# Altium PCB RbMotor_ECAT_RevB+.PcbDoc (part 1 of 4)
Units mm, origin at the board's own origin, x right, y up, seen from the top; angles counter-clockwise.
Board outline 58 x 58 mm, 4 copper layers (F.Cu, In1.Cu, In2.Cu, B.Cu); 285 components, 277 nets, 865 pads, 722 vias.
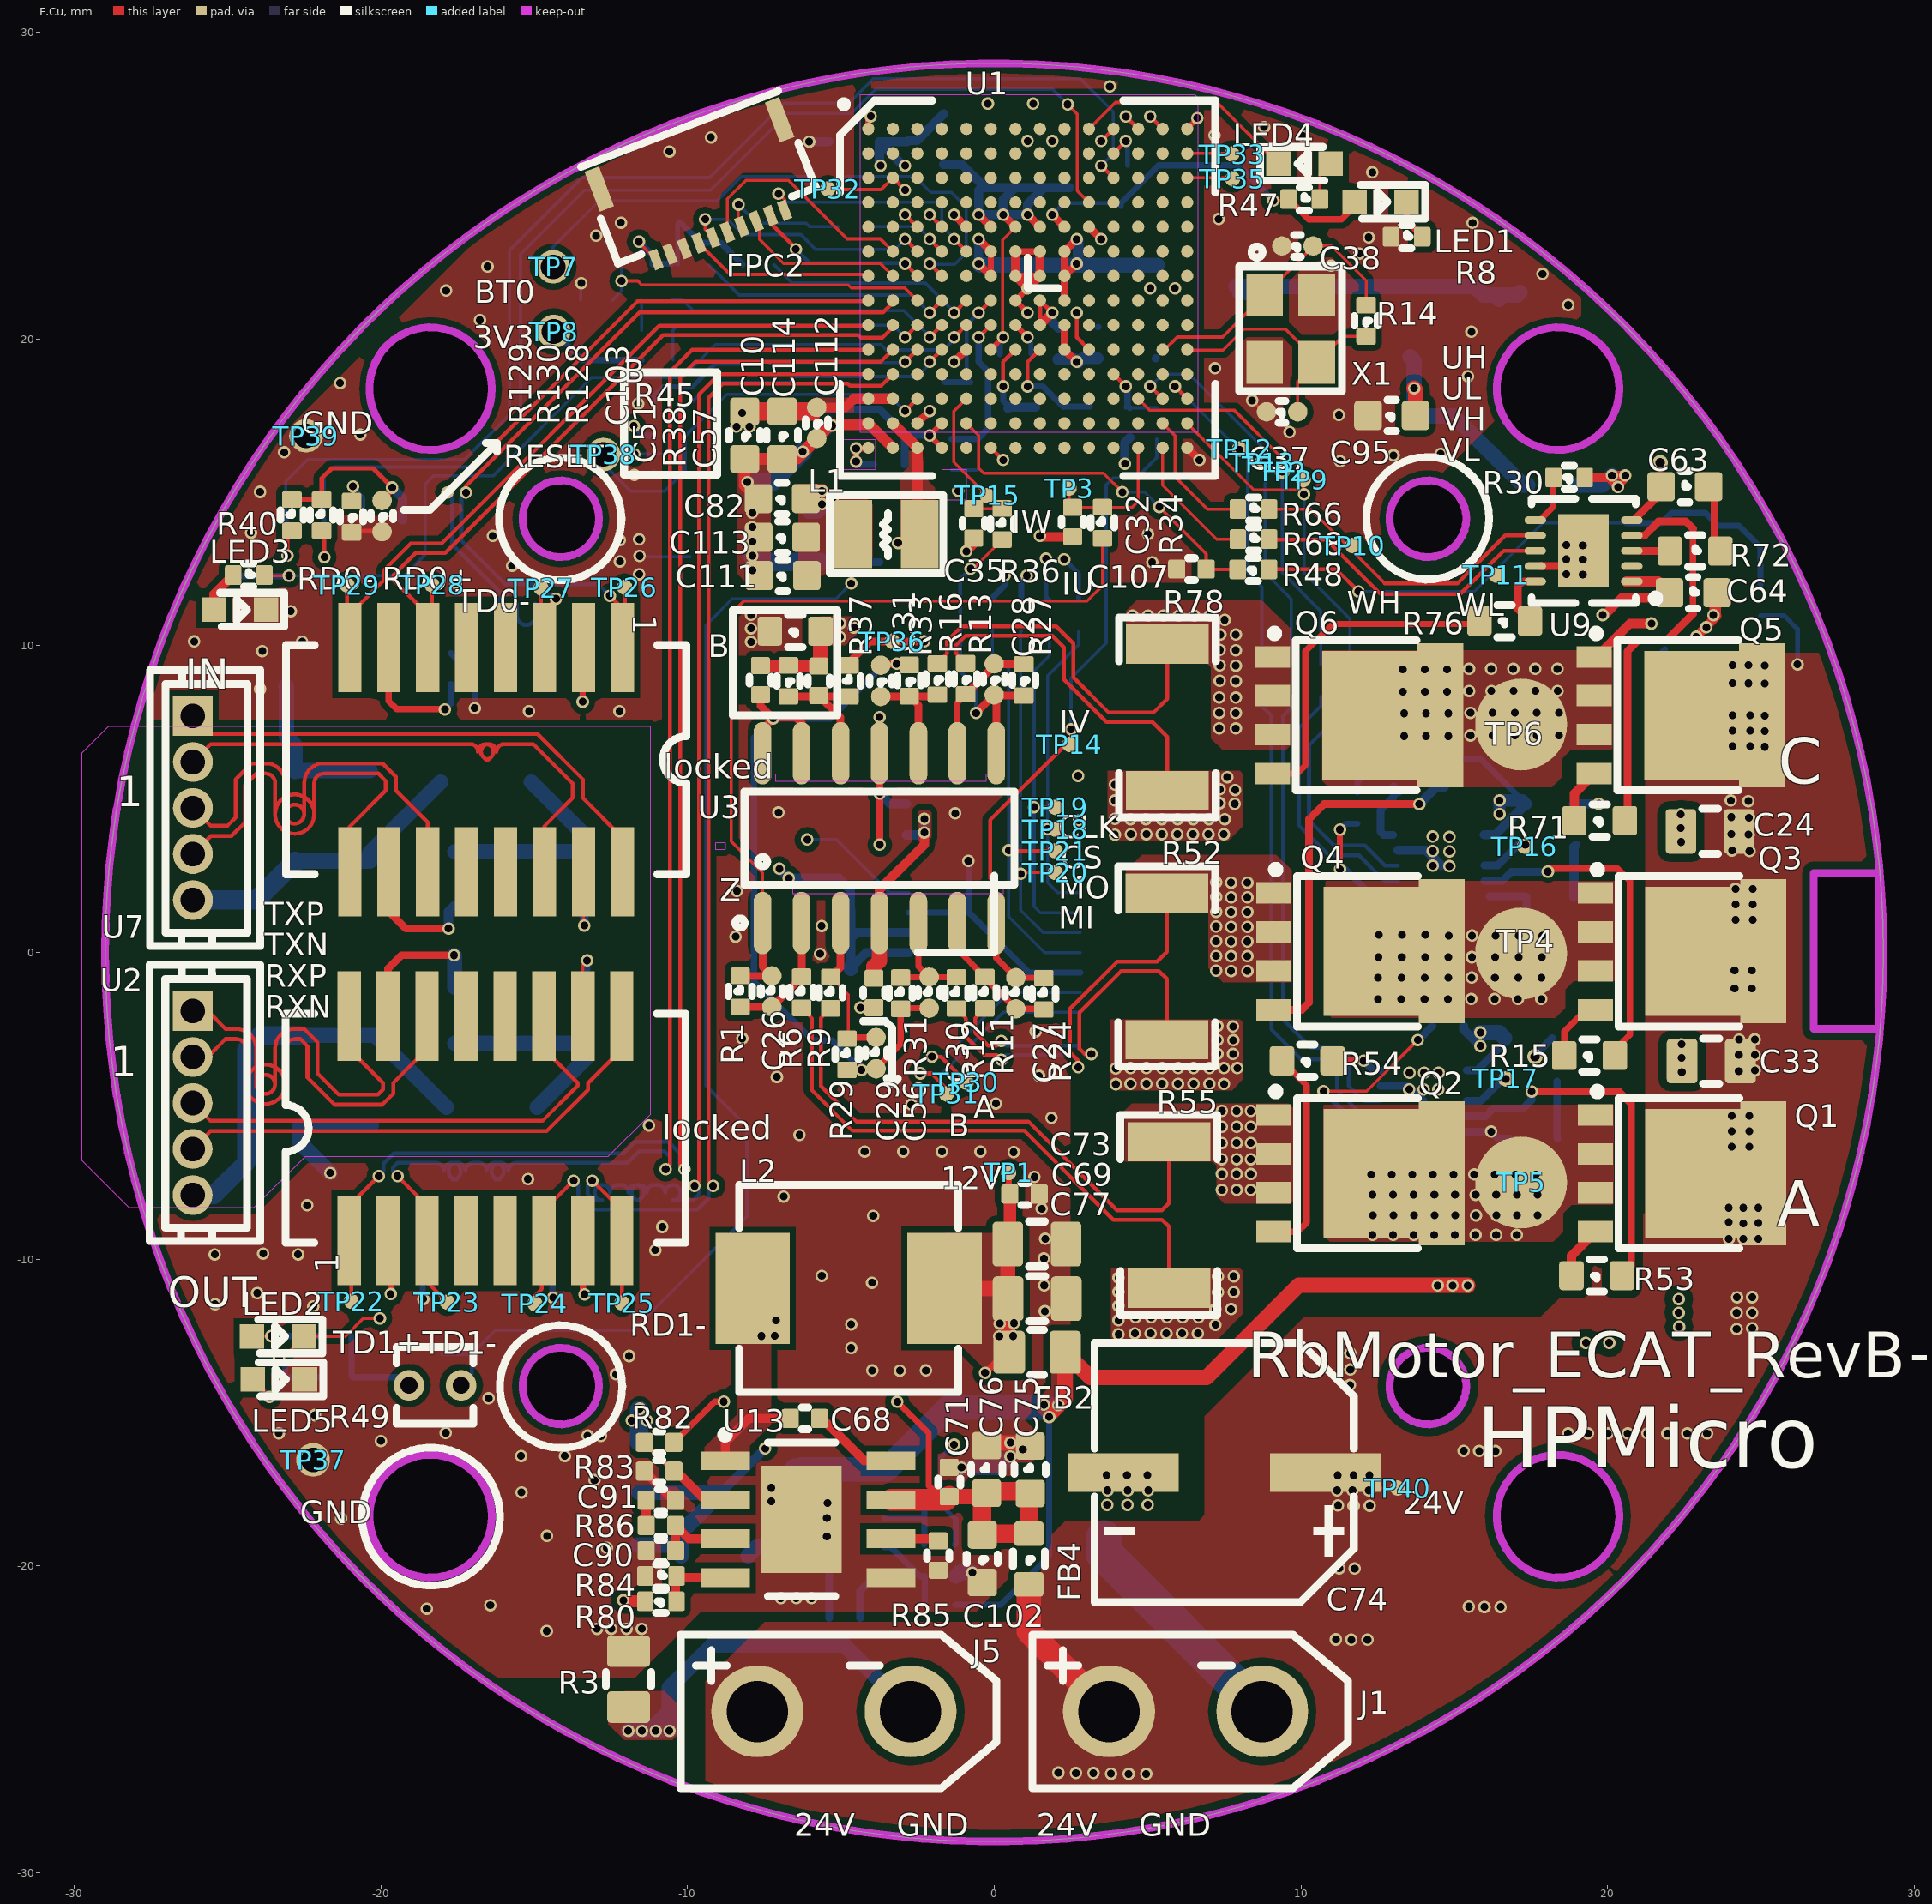
[diagram p0: F.Cu view]
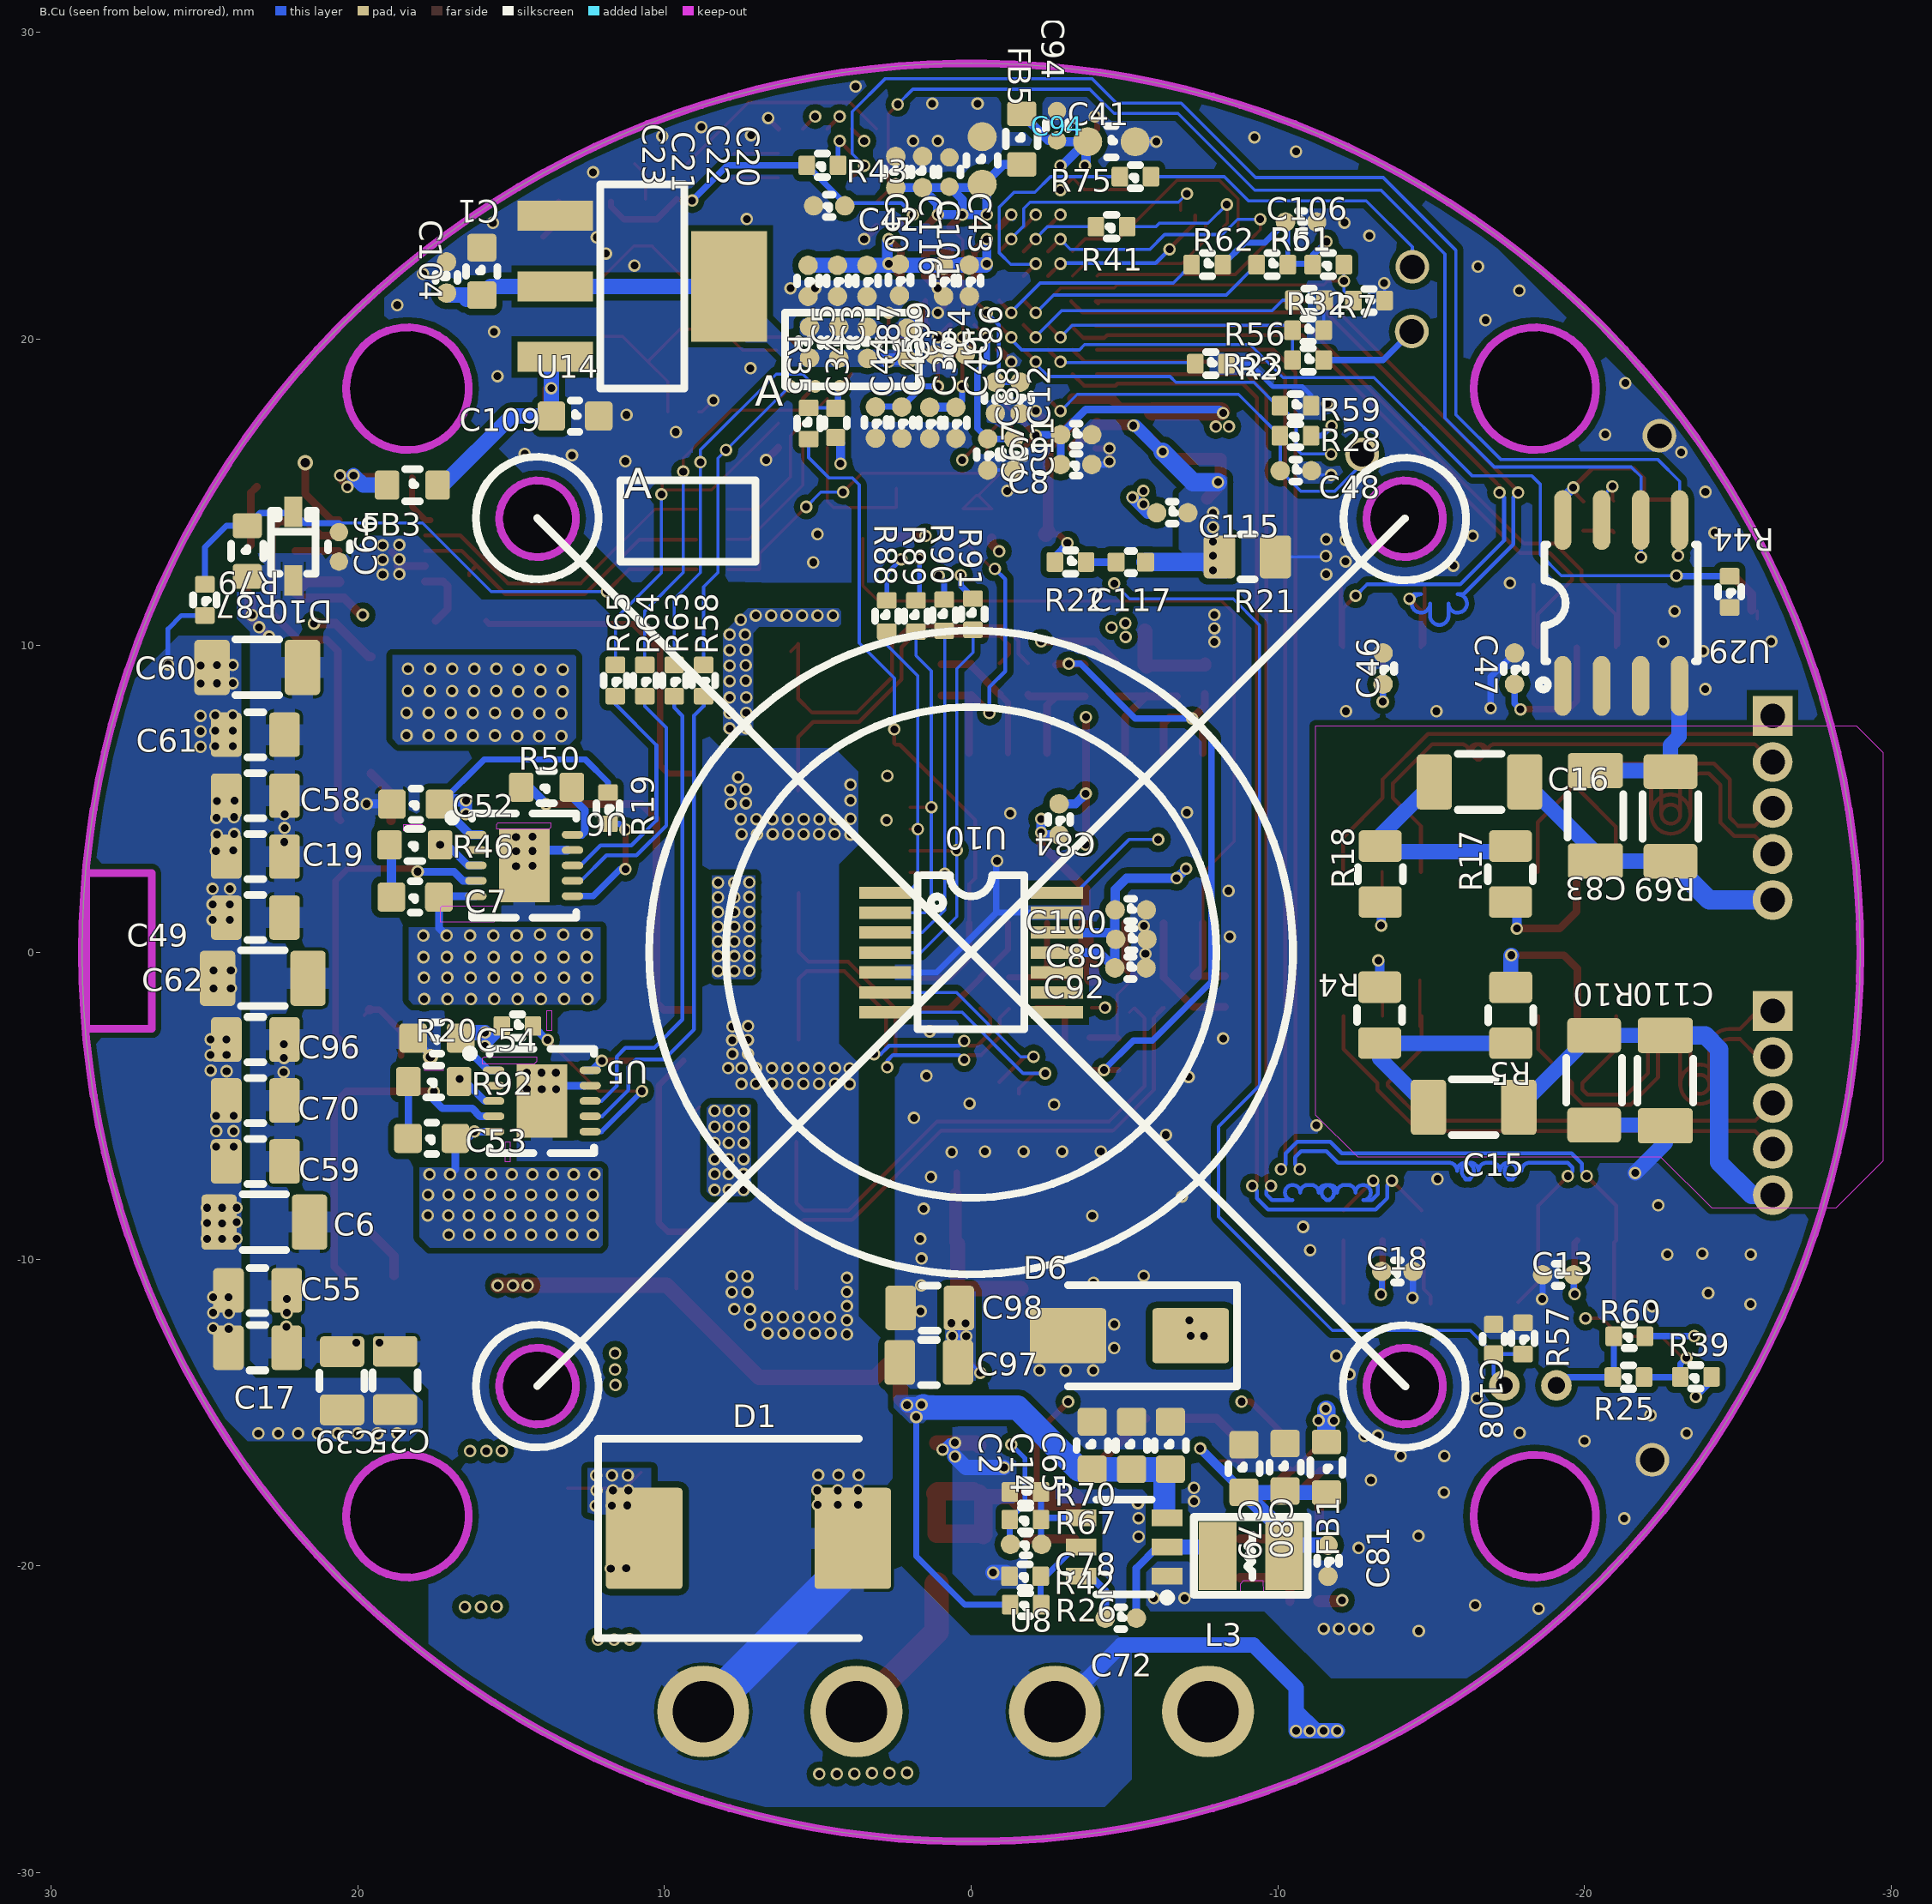
[diagram p1: B.Cu view, seen from below]
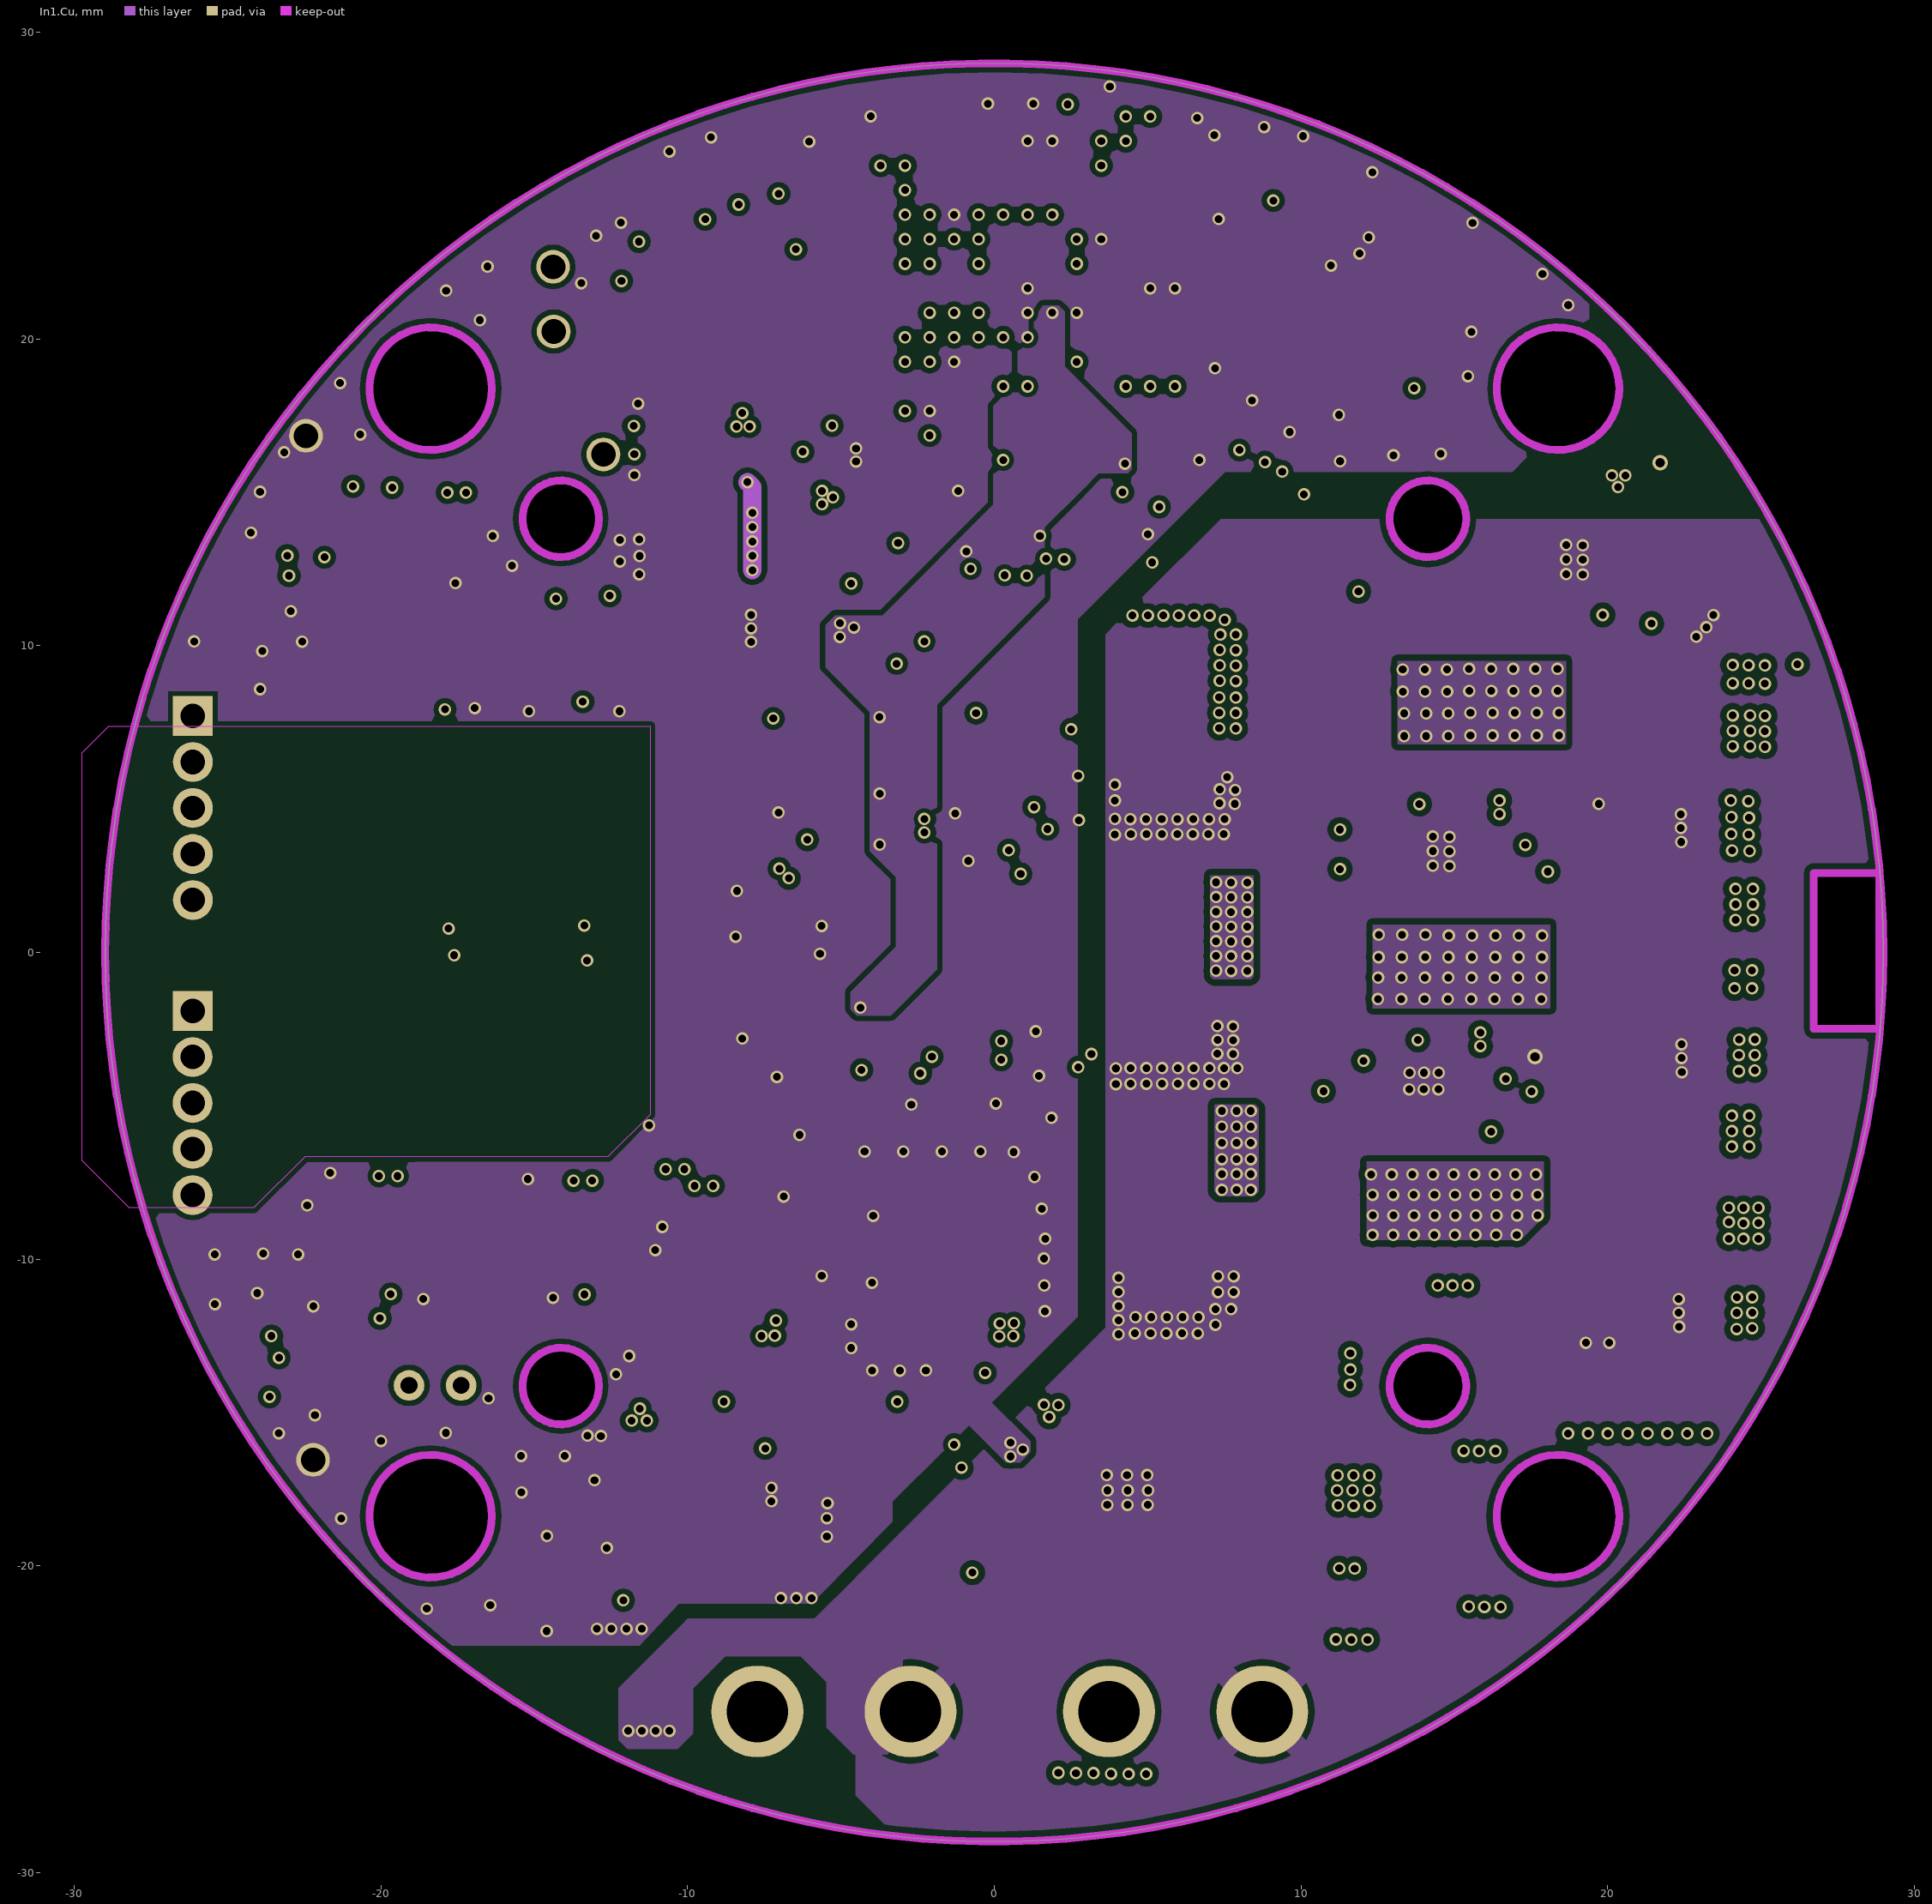
[diagram p2: In1.Cu]
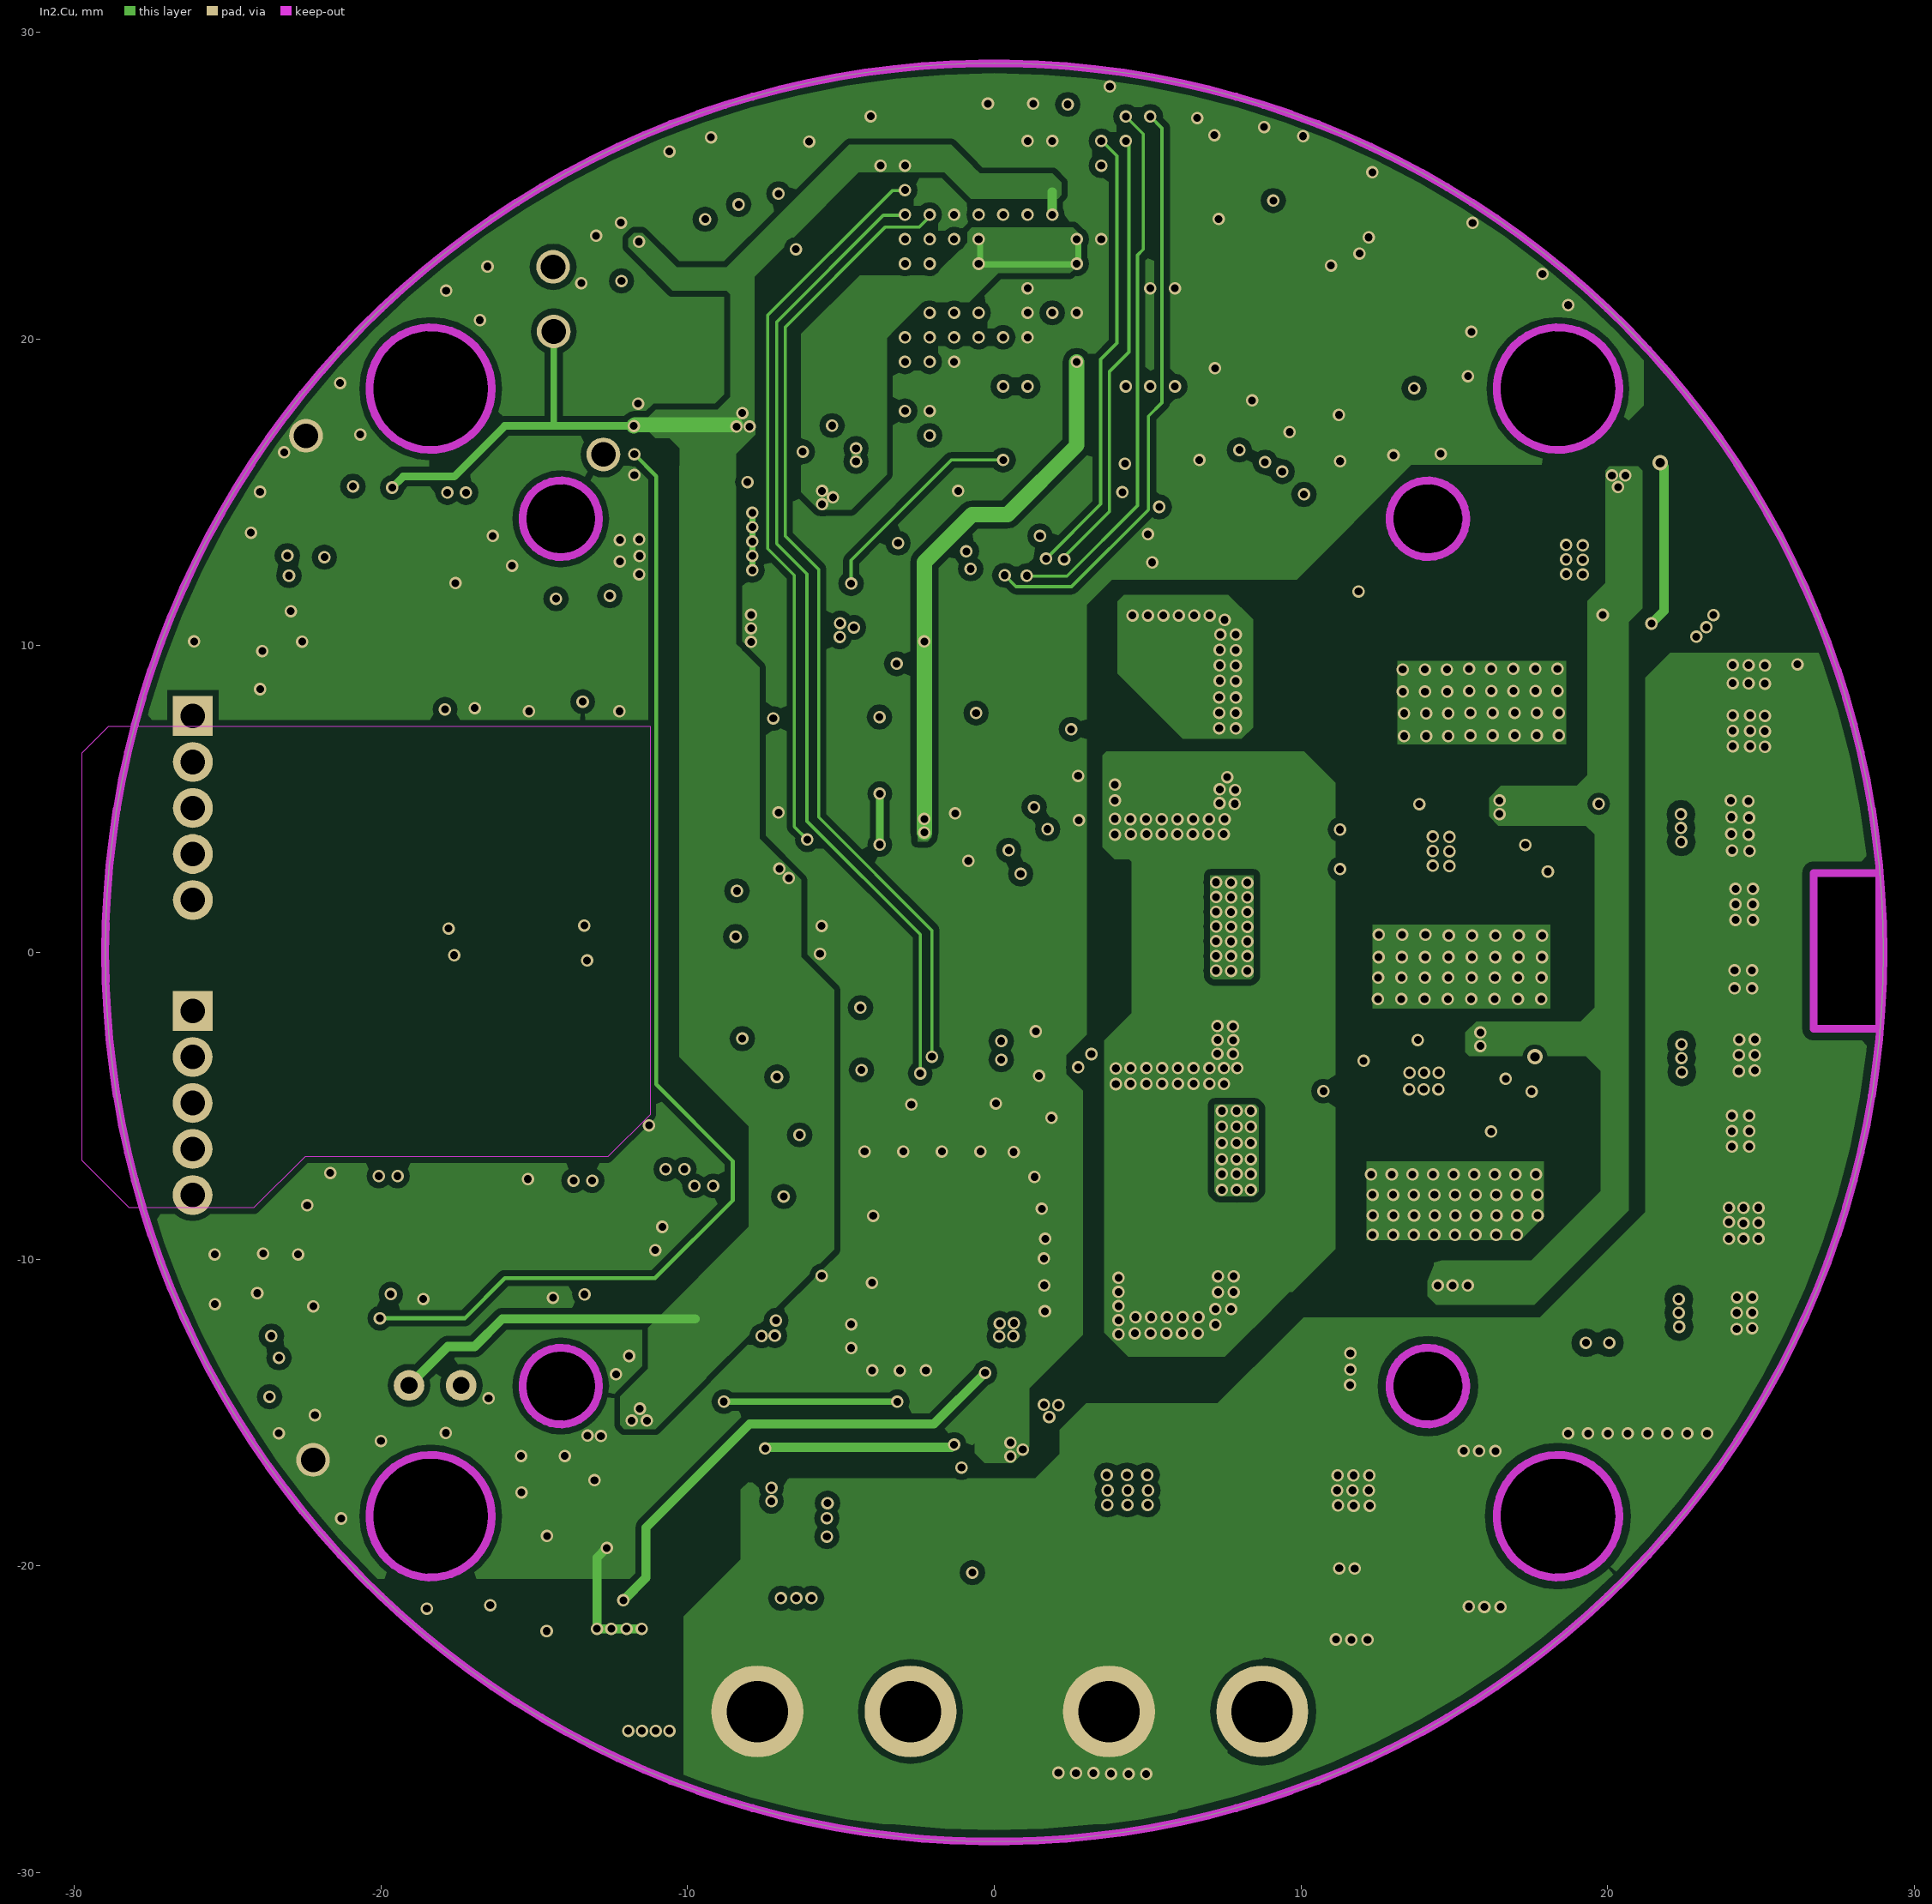
[diagram p3: In2.Cu]

## Layer stack, top to bottom
F.Mask: solder mask 0.0102, Solder Resist, Dk 3.5
F.Cu: signal copper 0.0356
Dielectric 1: dielectric 0.32, FR-4, Dk 4.8
In1.Cu: signal copper 0.0356
Dielectric2: dielectric 0.32, FR-4, Dk 4.8
In2.Cu: signal copper 0.0356
Dielectric3: dielectric 0.32, FR-4, Dk 4.8
B.Cu: signal copper 0.0356
B.Mask: solder mask 0.0102, Solder Resist, Dk 3.5

## Board outline
29,0 ccw(c0,0) 0,29 ccw(c0,0) -29,0 ccw(c0,0) 0,-29 ccw(c0,0)
cut-out: 20.394,-18.385 20.356,-17.993 20.241,-17.616 20.056,-17.268 19.806,-16.964 19.501,-16.714 19.154,-16.528 18.777,-16.414 18.385,-16.375 17.993,-16.414 17.616,-16.528 17.268,-16.714 16.964,-16.964 16.714,-17.268 16.528,-17.616 16.414,-17.993 16.375,-18.385 16.414,-18.777 16.528,-19.154 16.714,-19.501 16.964,-19.806 17.268,-20.056 17.616,-20.242 17.993,-20.356 18.385,-20.394 18.777,-20.356 19.154,-20.242 19.501,-20.056 19.806,-19.806 20.056,-19.501 20.241,-19.154 20.356,-18.777 20.394,-18.385
cut-out: 26.73,2.586 26.73,-2.484 28.86,-2.484 28.86,2.586 26.73,2.586
cut-out: 20.394,18.385 20.356,18.777 20.241,19.154 20.056,19.501 19.806,19.806 19.501,20.056 19.154,20.241 18.777,20.356 18.385,20.394 17.993,20.356 17.616,20.241 17.268,20.056 16.964,19.806 16.714,19.501 16.528,19.154 16.414,18.777 16.375,18.385 16.414,17.993 16.528,17.616 16.714,17.268 16.964,16.964 17.268,16.714 17.616,16.528 17.993,16.414 18.385,16.375 18.777,16.414 19.154,16.528 19.501,16.714 19.806,16.964 20.056,17.268 20.241,17.616 20.356,17.993 20.394,18.385
cut-out: -16.375,-18.385 -16.414,-17.993 -16.528,-17.616 -16.714,-17.268 -16.964,-16.964 -17.268,-16.714 -17.616,-16.528 -17.993,-16.414 -18.385,-16.375 -18.777,-16.414 -19.154,-16.528 -19.501,-16.714 -19.806,-16.964 -20.056,-17.268 -20.242,-17.616 -20.356,-17.993 -20.394,-18.385 -20.356,-18.777 -20.242,-19.154 -20.056,-19.501 -19.806,-19.806 -19.501,-20.056 -19.154,-20.241 -18.777,-20.356 -18.385,-20.394 -17.993,-20.356 -17.616,-20.241 -17.268,-20.056 -16.964,-19.806 -16.714,-19.501 -16.528,-19.154 -16.414,-18.777 -16.375,-18.385
cut-out: 15.403,-14.142 15.36,-13.816 15.234,-13.512 15.034,-13.251 14.773,-13.05 14.468,-12.924 14.142,-12.881 13.816,-12.924 13.512,-13.05 13.251,-13.251 13.05,-13.512 12.924,-13.816 12.881,-14.142 12.924,-14.468 13.05,-14.773 13.251,-15.034 13.512,-15.234 13.816,-15.36 14.142,-15.403 14.468,-15.36 14.773,-15.234 15.034,-15.034 15.234,-14.773 15.36,-14.468 15.403,-14.142
cut-out: -12.881,14.142 -12.924,14.468 -13.05,14.773 -13.251,15.034 -13.512,15.234 -13.816,15.36 -14.142,15.403 -14.468,15.36 -14.773,15.234 -15.034,15.034 -15.234,14.773 -15.36,14.468 -15.403,14.142 -15.36,13.816 -15.234,13.512 -15.034,13.251 -14.773,13.05 -14.468,12.924 -14.142,12.881 -13.816,12.924 -13.512,13.05 -13.251,13.251 -13.05,13.512 -12.924,13.816 -12.881,14.142
cut-out: -16.375,18.385 -16.414,18.777 -16.528,19.154 -16.714,19.501 -16.964,19.806 -17.268,20.056 -17.616,20.241 -17.993,20.356 -18.385,20.394 -18.777,20.356 -19.154,20.241 -19.501,20.056 -19.806,19.806 -20.056,19.501 -20.241,19.154 -20.356,18.777 -20.394,18.385 -20.356,17.993 -20.241,17.616 -20.056,17.268 -19.806,16.964 -19.501,16.714 -19.154,16.528 -18.777,16.414 -18.385,16.375 -17.993,16.414 -17.616,16.528 -17.268,16.714 -16.964,16.964 -16.714,17.268 -16.528,17.616 -16.414,17.993 -16.375,18.385
cut-out: 15.403,14.142 15.36,14.468 15.234,14.772 15.034,15.034 14.773,15.234 14.468,15.36 14.142,15.403 13.816,15.36 13.512,15.234 13.251,15.034 13.05,14.772 12.924,14.468 12.881,14.142 12.924,13.816 13.05,13.512 13.251,13.251 13.512,13.05 13.816,12.924 14.142,12.881 14.468,12.924 14.773,13.05 15.034,13.251 15.234,13.512 15.36,13.816 15.403,14.142
cut-out: -12.881,-14.142 -12.924,-13.816 -13.05,-13.512 -13.251,-13.251 -13.512,-13.05 -13.816,-12.924 -14.142,-12.881 -14.468,-12.924 -14.773,-13.05 -15.034,-13.251 -15.234,-13.512 -15.36,-13.816 -15.403,-14.142 -15.36,-14.468 -15.234,-14.773 -15.034,-15.034 -14.773,-15.234 -14.468,-15.36 -14.142,-15.403 -13.816,-15.36 -13.512,-15.234 -13.251,-15.034 -13.05,-14.773 -12.924,-14.468 -12.881,-14.142

## Design rules (kind name [scope] priority, off if disabled: settings)
Clearance "Clearence 0.254_Polygon" [InNamedPolygon('F.Cu-+24V') OR InNamedPolygon('In2.Cu-+24V')] p1: gap=0.254 ignorepadtopadclearanceinfootprint=FALSE
Clearance "Clearence 0.2_Polygon" [InNamedPolygon('F.Cu-+1V2') OR InNamedPolygon('F.Cu-+12VA') OR InNamedPolygon('F.Cu-BGND-1') OR InNamedPolygon('F.Cu-GND') OR InNamedPolygon('F.Cu-+12V') OR InNamedPolygon('F.Cu-Net-(D6-K)') OR InNamedPolygon('F.Cu-+3.3V') OR InNamedPolygon('F.Cu-DCDC_GND') OR InNamedPolygon('F.Cu-DCDC_LP') OR InNamedPolygon('F.Cu-+3.3VA') OR InNamedPolygon('In2.Cu-+3.3VA') OR InNamedPolygon('F.Cu-GND-1') OR InNamedPolygon('B.Cu-GND') OR InNamedPolygon('In1.Cu-GND-1') OR InNamedPolygon('In1.Cu-BGND') OR InNamedPolygon('In1.Cu-BGND-1') OR InNamedPolygon('In1.Cu-/ MAIN/13.Motor DriverB/MOTOR-V') OR InNamedPolygon('In2.Cu-/ MAIN/13.Motor DriverB/MOTOR-V') OR InNamedPolygon('In1.Cu-/ MAIN/12.Motor DriverA/MOTOR-U') OR InNamedPolygon('In2.Cu-/ MAIN/12.Motor DriverA/MOTOR-U') OR InNamedPolygon('In1.Cu-/ MAIN/14.Motor DriverC/MOTOR-W') OR InNamedPolygon('In2.Cu-/ MAIN/14.Motor DriverC/MOTOR-W') OR InNamedPolygon('In1.Cu-MT_IV') OR InNamedPolygon('In2.Cu-MT_IV') OR InNamedPolygon('B.Cu-MT_IV') OR InNamedPolygon('In1.Cu-MT_IU') OR InNamedPolygon('In2.Cu-MT_IU') OR InNamedPolygon('B.Cu-MT_IU') OR InNamedPolygon('In2.Cu-GND') OR InNamedPolygon('In2.Cu-+3.3V') OR InNamedPolygon('In2.Cu-BGND') OR InNamedPolygon('In2.Cu-+24V-1') OR InNamedPolygon('In2.Cu-+3.3V-1') OR InNamedPolygon('In2.Cu-GND-1') OR InNamedPolygon('In2.Cu-MT_IW') OR InNamedPolygon('In2.Cu-+1V2') OR InNamedPolygon('B.Cu-AGND') OR InNamedPolygon('B.Cu-+12VA') OR InNamedPolygon('B.Cu-+12V') OR InNamedPolygon('B.Cu-DCDC_GND') OR InNamedPolygon('B.Cu-+3.3VA') OR InNamedPolygon('B.Cu-BGND')] p2: gap=0.2 ignorepadtopadclearanceinfootprint=FALSE
Clearance "Clearence 0.18_Polygon" [InNamedPolygon('B.Cu-+24V')] p3: gap=0.18 ignorepadtopadclearanceinfootprint=FALSE
Clearance "Clearence 0.17_Polygon" [InNamedPolygon('In1.Cu-GND')] p4: gap=0.17 ignorepadtopadclearanceinfootprint=FALSE
Clearance "Clearence 0.1524_Polygon" [InNamedPolygon('F.Cu-BGND') OR InNamedPolygon('F.Cu-MT_IU') OR InNamedPolygon('F.Cu-BGND-2') OR InNamedPolygon('F.Cu-MT_IW') OR InNamedPolygon('F.Cu-/ MAIN/12.Motor DriverA/MOTOR-U') OR InNamedPolygon('F.Cu-MT_IV') OR InNamedPolygon('F.Cu-/ MAIN/14.Motor DriverC/MOTOR-W') OR InNamedPolygon('F.Cu-BGND-3') OR InNamedPolygon('F.Cu-/ MAIN/13.Motor DriverB/MOTOR-V') OR InNamedPolygon('In1.Cu-AGND') OR InNamedPolygon('In2.Cu-+12V') OR InNamedPolygon('B.Cu-/ MAIN/12.Motor DriverA/MOTOR-U') OR InNamedPolygon('B.Cu-/ MAIN/14.Motor DriverC/MOTOR-W') OR InNamedPolygon('B.Cu-/ MAIN/13.Motor DriverB/MOTOR-V')] p5: gap=0.152 ignorepadtopadclearanceinfootprint=FALSE
Clearance "Clearence 0.15_Polygon" [InNamedPolygon('F.Cu-AGND')] p6: gap=0.15 ignorepadtopadclearanceinfootprint=FALSE
MinimumSolderMaskSliver [All] p1: minsoldermaskwidth=0
PolygonConnect Polygon_B.Cu-+24V-1_ConnectDirect [IsNamedPolygon('B.Cu-+24V-1')] p1: connectstyle=Direct reliefconductorwidth=0.254 reliefentries=4 polygonreliefangle="90 Angle" airgapwidth=0.254
PolygonConnect Polygon_B.Cu-BGND_ConnectDirect [IsNamedPolygon('B.Cu-BGND') vs IsVia] p2: connectstyle=Direct reliefconductorwidth=0.254 reliefentries=4 polygonreliefangle="90 Angle" airgapwidth=0.254
PolygonConnect Polygon_B.Cu-BGND_ConnectRelief45 [IsNamedPolygon('B.Cu-BGND') vs (IsThruPin or IsSMTPin) and (PadShape_AllLayers = 'Round')] p3: connectstyle=Relief reliefconductorwidth=0.7 reliefentries=4 polygonreliefangle="45 Angle" airgapwidth=0.1
PolygonConnect Polygon_B.Cu-BGND_ConnectRelief90 [IsNamedPolygon('B.Cu-BGND') vs (IsThruPin or IsSMTPin) and (PadShape_AllLayers <> 'Round')] p4: connectstyle=Relief reliefconductorwidth=0.7 reliefentries=4 polygonreliefangle="90 Angle" airgapwidth=0.1
PolygonConnect "Polygon_B.Cu-/ MAIN/13.Motor DriverB/MOTOR-V_ConnectDirect" [IsNamedPolygon('B.Cu-/ MAIN/13.Motor DriverB/MOTOR-V')] p5: connectstyle=Direct reliefconductorwidth=0.254 reliefentries=4 polygonreliefangle="90 Angle" airgapwidth=0.254
PolygonConnect Polygon_B.Cu-+3.3VA_ConnectDirect [IsNamedPolygon('B.Cu-+3.3VA')] p6: connectstyle=Direct reliefconductorwidth=0.254 reliefentries=4 polygonreliefangle="90 Angle" airgapwidth=0.254
PolygonConnect "Polygon_B.Cu-/ MAIN/14.Motor DriverC/MOTOR-W_ConnectDirect" [IsNamedPolygon('B.Cu-/ MAIN/14.Motor DriverC/MOTOR-W')] p7: connectstyle=Direct reliefconductorwidth=0.254 reliefentries=4 polygonreliefangle="90 Angle" airgapwidth=0.254
PolygonConnect Polygon_B.Cu-DCDC_GND_ConnectDirect [IsNamedPolygon('B.Cu-DCDC_GND')] p8: connectstyle=Direct reliefconductorwidth=0.254 reliefentries=4 polygonreliefangle="90 Angle" airgapwidth=0.254
PolygonConnect Polygon_B.Cu-+12V_ConnectDirect [IsNamedPolygon('B.Cu-+12V')] p9: connectstyle=Direct reliefconductorwidth=0.254 reliefentries=4 polygonreliefangle="90 Angle" airgapwidth=0.254
PolygonConnect Polygon_B.Cu-+12VA_ConnectDirect [IsNamedPolygon('B.Cu-+12VA')] p10: connectstyle=Direct reliefconductorwidth=0.254 reliefentries=4 polygonreliefangle="90 Angle" airgapwidth=0.254
PolygonConnect Polygon_B.Cu-+24V_ConnectDirect [IsNamedPolygon('B.Cu-+24V')] p11: connectstyle=Direct reliefconductorwidth=0.254 reliefentries=4 polygonreliefangle="90 Angle" airgapwidth=0.254
PolygonConnect Polygon_B.Cu-AGND_ConnectDirect [IsNamedPolygon('B.Cu-AGND')] p12: connectstyle=Direct reliefconductorwidth=0.254 reliefentries=4 polygonreliefangle="90 Angle" airgapwidth=0.254
PolygonConnect "Polygon_B.Cu-/ MAIN/12.Motor DriverA/MOTOR-U_ConnectDirect" [IsNamedPolygon('B.Cu-/ MAIN/12.Motor DriverA/MOTOR-U')] p13: connectstyle=Direct reliefconductorwidth=0.254 reliefentries=4 polygonreliefangle="90 Angle" airgapwidth=0.254
PolygonConnect Polygon_B.Cu-MT_IW_ConnectDirect [IsNamedPolygon('B.Cu-MT_IW')] p14: connectstyle=Direct reliefconductorwidth=0.254 reliefentries=4 polygonreliefangle="90 Angle" airgapwidth=0.254
PolygonConnect Polygon_In2.Cu-+1V2_ConnectDirect [IsNamedPolygon('In2.Cu-+1V2')] p15: connectstyle=Direct reliefconductorwidth=0.254 reliefentries=4 polygonreliefangle="90 Angle" airgapwidth=0.254
PolygonConnect Polygon_In2.Cu-MT_IW_ConnectDirect [IsNamedPolygon('In2.Cu-MT_IW')] p16: connectstyle=Direct reliefconductorwidth=0.254 reliefentries=4 polygonreliefangle="90 Angle" airgapwidth=0.254
PolygonConnect Polygon_In2.Cu-+12V-1_ConnectDirect [IsNamedPolygon('In2.Cu-+12V-1')] p17: connectstyle=Direct reliefconductorwidth=0.254 reliefentries=4 polygonreliefangle="90 Angle" airgapwidth=0.254
PolygonConnect Polygon_In2.Cu-GND-1_ConnectDirect [IsNamedPolygon('In2.Cu-GND-1')] p18: connectstyle=Direct reliefconductorwidth=0.254 reliefentries=4 polygonreliefangle="90 Angle" airgapwidth=0.254
PolygonConnect Polygon_In2.Cu-+3.3V-1_ConnectDirect [IsNamedPolygon('In2.Cu-+3.3V-1')] p19: connectstyle=Direct reliefconductorwidth=0.254 reliefentries=4 polygonreliefangle="90 Angle" airgapwidth=0.254
PolygonConnect Polygon_In2.Cu-+24V-1_ConnectDirect [IsNamedPolygon('In2.Cu-+24V-1')] p20: connectstyle=Direct reliefconductorwidth=0.254 reliefentries=4 polygonreliefangle="90 Angle" airgapwidth=0.254
PolygonConnect Polygon_In2.Cu-BGND_ConnectDirect [IsNamedPolygon('In2.Cu-BGND')] p21: connectstyle=Direct reliefconductorwidth=0.254 reliefentries=4 polygonreliefangle="90 Angle" airgapwidth=0.254
PolygonConnect Polygon_In2.Cu-+3.3V_ConnectDirect [IsNamedPolygon('In2.Cu-+3.3V') vs IsVia] p22: connectstyle=Direct reliefconductorwidth=0.254 reliefentries=4 polygonreliefangle="90 Angle" airgapwidth=0.254
PolygonConnect Polygon_In2.Cu-+3.3V_ConnectRelief45 [IsNamedPolygon('In2.Cu-+3.3V') vs (IsThruPin or IsSMTPin) and (PadShape_AllLayers = 'Round')] p23: connectstyle=Relief reliefconductorwidth=0.5 reliefentries=4 polygonreliefangle="45 Angle" airgapwidth=0.5
PolygonConnect Polygon_In2.Cu-+3.3V_ConnectRelief90 [IsNamedPolygon('In2.Cu-+3.3V') vs (IsThruPin or IsSMTPin) and (PadShape_AllLayers <> 'Round')] p24: connectstyle=Relief reliefconductorwidth=0.5 reliefentries=4 polygonreliefangle="90 Angle" airgapwidth=0.5
PolygonConnect Polygon_In2.Cu-GND_ConnectDirect [IsNamedPolygon('In2.Cu-GND')] p25: connectstyle=Direct reliefconductorwidth=0.254 reliefentries=4 polygonreliefangle="90 Angle" airgapwidth=0.254
PolygonConnect Polygon_In2.Cu-+12V_ConnectDirect [IsNamedPolygon('In2.Cu-+12V')] p26: connectstyle=Direct reliefconductorwidth=0.254 reliefentries=4 polygonreliefangle="90 Angle" airgapwidth=0.254
PolygonConnect Polygon_B.Cu-MT_IU_ConnectDirect [IsNamedPolygon('B.Cu-MT_IU')] p27: connectstyle=Direct reliefconductorwidth=0.254 reliefentries=4 polygonreliefangle="90 Angle" airgapwidth=0.254
PolygonConnect Polygon_In2.Cu-MT_IU_ConnectDirect [IsNamedPolygon('In2.Cu-MT_IU')] p28: connectstyle=Direct reliefconductorwidth=0.254 reliefentries=4 polygonreliefangle="90 Angle" airgapwidth=0.254
PolygonConnect Polygon_In1.Cu-MT_IU_ConnectDirect [IsNamedPolygon('In1.Cu-MT_IU')] p29: connectstyle=Direct reliefconductorwidth=0.254 reliefentries=4 polygonreliefangle="90 Angle" airgapwidth=0.254
PolygonConnect Polygon_B.Cu-MT_IV_ConnectDirect [IsNamedPolygon('B.Cu-MT_IV')] p30: connectstyle=Direct reliefconductorwidth=0.254 reliefentries=4 polygonreliefangle="90 Angle" airgapwidth=0.254
PolygonConnect Polygon_In2.Cu-MT_IV_ConnectDirect [IsNamedPolygon('In2.Cu-MT_IV')] p31: connectstyle=Direct reliefconductorwidth=0.254 reliefentries=4 polygonreliefangle="90 Angle" airgapwidth=0.254
PolygonConnect Polygon_In1.Cu-MT_IV_ConnectDirect [IsNamedPolygon('In1.Cu-MT_IV')] p32: connectstyle=Direct reliefconductorwidth=0.254 reliefentries=4 polygonreliefangle="90 Angle" airgapwidth=0.254
PolygonConnect "Polygon_In2.Cu-/ MAIN/14.Motor DriverC/MOTOR-W_ConnectDirect" [IsNamedPolygon('In2.Cu-/ MAIN/14.Motor DriverC/MOTOR-W')] p33: connectstyle=Direct reliefconductorwidth=0.254 reliefentries=4 polygonreliefangle="90 Angle" airgapwidth=0.254
PolygonConnect "Polygon_In1.Cu-/ MAIN/14.Motor DriverC/MOTOR-W_ConnectDirect" [IsNamedPolygon('In1.Cu-/ MAIN/14.Motor DriverC/MOTOR-W')] p34: connectstyle=Direct reliefconductorwidth=0.254 reliefentries=4 polygonreliefangle="90 Angle" airgapwidth=0.254
PolygonConnect "Polygon_In2.Cu-/ MAIN/12.Motor DriverA/MOTOR-U_ConnectDirect" [IsNamedPolygon('In2.Cu-/ MAIN/12.Motor DriverA/MOTOR-U')] p35: connectstyle=Direct reliefconductorwidth=0.254 reliefentries=4 polygonreliefangle="90 Angle" airgapwidth=0.254
PolygonConnect "Polygon_In1.Cu-/ MAIN/12.Motor DriverA/MOTOR-U_ConnectDirect" [IsNamedPolygon('In1.Cu-/ MAIN/12.Motor DriverA/MOTOR-U')] p36: connectstyle=Direct reliefconductorwidth=0.254 reliefentries=4 polygonreliefangle="90 Angle" airgapwidth=0.254
PolygonConnect "Polygon_In2.Cu-/ MAIN/13.Motor DriverB/MOTOR-V_ConnectDirect" [IsNamedPolygon('In2.Cu-/ MAIN/13.Motor DriverB/MOTOR-V')] p37: connectstyle=Direct reliefconductorwidth=0.254 reliefentries=4 polygonreliefangle="90 Angle" airgapwidth=0.254
PolygonConnect "Polygon_In1.Cu-/ MAIN/13.Motor DriverB/MOTOR-V_ConnectDirect" [IsNamedPolygon('In1.Cu-/ MAIN/13.Motor DriverB/MOTOR-V')] p38: connectstyle=Direct reliefconductorwidth=0.254 reliefentries=4 polygonreliefangle="90 Angle" airgapwidth=0.254
PolygonConnect Polygon_In1.Cu-AGND_ConnectDirect [IsNamedPolygon('In1.Cu-AGND')] p39: connectstyle=Direct reliefconductorwidth=0.254 reliefentries=4 polygonreliefangle="90 Angle" airgapwidth=0.254
PolygonConnect Polygon_In1.Cu-BGND-1_ConnectDirect [IsNamedPolygon('In1.Cu-BGND-1')] p40: connectstyle=Direct reliefconductorwidth=0.254 reliefentries=4 polygonreliefangle="90 Angle" airgapwidth=0.254
PolygonConnect Polygon_In1.Cu-BGND_ConnectDirect [IsNamedPolygon('In1.Cu-BGND') vs IsVia] p41: connectstyle=Direct reliefconductorwidth=0.254 reliefentries=4 polygonreliefangle="90 Angle" airgapwidth=0.254
PolygonConnect Polygon_In1.Cu-BGND_ConnectRelief45 [IsNamedPolygon('In1.Cu-BGND') vs (IsThruPin or IsSMTPin) and (PadShape_AllLayers = 'Round')] p42: connectstyle=Relief reliefconductorwidth=0.7 reliefentries=4 polygonreliefangle="45 Angle" airgapwidth=0.2
PolygonConnect Polygon_In1.Cu-BGND_ConnectRelief90 [IsNamedPolygon('In1.Cu-BGND') vs (IsThruPin or IsSMTPin) and (PadShape_AllLayers <> 'Round')] p43: connectstyle=Relief reliefconductorwidth=0.7 reliefentries=4 polygonreliefangle="90 Angle" airgapwidth=0.2
PolygonConnect Polygon_In1.Cu-GND-1_ConnectDirect [IsNamedPolygon('In1.Cu-GND-1')] p44: connectstyle=Direct reliefconductorwidth=0.254 reliefentries=4 polygonreliefangle="90 Angle" airgapwidth=0.254
PolygonConnect Polygon_In1.Cu-GND_ConnectDirect [IsNamedPolygon('In1.Cu-GND')] p45: connectstyle=Direct reliefconductorwidth=0.254 reliefentries=4 polygonreliefangle="90 Angle" airgapwidth=0.254
PolygonConnect Polygon_B.Cu-GND_ConnectDirect [IsNamedPolygon('B.Cu-GND')] p46: connectstyle=Direct reliefconductorwidth=0.254 reliefentries=4 polygonreliefangle="90 Angle" airgapwidth=0.254
PolygonConnect Polygon_F.Cu-GND-1_ConnectDirect [IsNamedPolygon('F.Cu-GND-1')] p47: connectstyle=Direct reliefconductorwidth=0.254 reliefentries=4 polygonreliefangle="90 Angle" airgapwidth=0.254
PolygonConnect Polygon_In2.Cu-+3.3VA_ConnectDirect [IsNamedPolygon('In2.Cu-+3.3VA')] p48: connectstyle=Direct reliefconductorwidth=0.254 reliefentries=4 polygonreliefangle="90 Angle" airgapwidth=0.254
PolygonConnect Polygon_F.Cu-+3.3VA_ConnectDirect [IsNamedPolygon('F.Cu-+3.3VA')] p49: connectstyle=Direct reliefconductorwidth=0.254 reliefentries=4 polygonreliefangle="90 Angle" airgapwidth=0.254
PolygonConnect Polygon_In2.Cu-+24V_ConnectDirect [IsNamedPolygon('In2.Cu-+24V')] p50: connectstyle=Direct reliefconductorwidth=0.254 reliefentries=4 polygonreliefangle="90 Angle" airgapwidth=0.254
PolygonConnect Polygon_F.Cu-+24V_ConnectDirect [IsNamedPolygon('F.Cu-+24V')] p51: connectstyle=Direct reliefconductorwidth=0.254 reliefentries=4 polygonreliefangle="90 Angle" airgapwidth=0.254
PolygonConnect "Polygon_F.Cu-/ MAIN/13.Motor DriverB/MOTOR-V_ConnectDirect" [IsNamedPolygon('F.Cu-/ MAIN/13.Motor DriverB/MOTOR-V')] p52: connectstyle=Direct reliefconductorwidth=0.254 reliefentries=4 polygonreliefangle="90 Angle" airgapwidth=0.254
PolygonConnect Polygon_F.Cu-DCDC_LP_ConnectDirect [IsNamedPolygon('F.Cu-DCDC_LP')] p53: connectstyle=Direct reliefconductorwidth=0.254 reliefentries=4 polygonreliefangle="90 Angle" airgapwidth=0.254
PolygonConnect Polygon_F.Cu-BGND-3_ConnectDirect [IsNamedPolygon('F.Cu-BGND-3')] p54: connectstyle=Direct reliefconductorwidth=0.254 reliefentries=4 polygonreliefangle="90 Angle" airgapwidth=0.254
PolygonConnect Polygon_F.Cu-DCDC_GND_ConnectDirect [IsNamedPolygon('F.Cu-DCDC_GND')] p55: connectstyle=Direct reliefconductorwidth=0.254 reliefentries=4 polygonreliefangle="90 Angle" airgapwidth=0.254
PolygonConnect "Polygon_F.Cu-/ MAIN/14.Motor DriverC/MOTOR-W_ConnectDirect" [IsNamedPolygon('F.Cu-/ MAIN/14.Motor DriverC/MOTOR-W')] p56: connectstyle=Direct reliefconductorwidth=0.254 reliefentries=4 polygonreliefangle="90 Angle" airgapwidth=0.254
PolygonConnect Polygon_F.Cu-MT_IV_ConnectDirect [IsNamedPolygon('F.Cu-MT_IV')] p57: connectstyle=Direct reliefconductorwidth=0.254 reliefentries=4 polygonreliefangle="90 Angle" airgapwidth=0.254
PolygonConnect Polygon_F.Cu-+3.3V_ConnectDirect [IsNamedPolygon('F.Cu-+3.3V')] p58: connectstyle=Direct reliefconductorwidth=0.254 reliefentries=4 polygonreliefangle="90 Angle" airgapwidth=0.254
PolygonConnect Polygon_F.Cu-Net-(D6-K)_ConnectDirect [IsNamedPolygon('F.Cu-Net-(D6-K)')] p59: connectstyle=Direct reliefconductorwidth=0.254 reliefentries=4 polygonreliefangle="90 Angle" airgapwidth=0.254
PolygonConnect "Polygon_F.Cu-/ MAIN/12.Motor DriverA/MOTOR-U_ConnectDirect" [IsNamedPolygon('F.Cu-/ MAIN/12.Motor DriverA/MOTOR-U')] p60: connectstyle=Direct reliefconductorwidth=0.254 reliefentries=4 polygonreliefangle="90 Angle" airgapwidth=0.254
PolygonConnect Polygon_F.Cu-MT_IW_ConnectDirect [IsNamedPolygon('F.Cu-MT_IW')] p61: connectstyle=Direct reliefconductorwidth=0.254 reliefentries=4 polygonreliefangle="90 Angle" airgapwidth=0.254
PolygonConnect Polygon_F.Cu-+12V_ConnectDirect [IsNamedPolygon('F.Cu-+12V')] p62: connectstyle=Direct reliefconductorwidth=0.254 reliefentries=4 polygonreliefangle="90 Angle" airgapwidth=0.254
PolygonConnect Polygon_F.Cu-BGND-2_ConnectDirect [IsNamedPolygon('F.Cu-BGND-2')] p63: connectstyle=Direct reliefconductorwidth=0.254 reliefentries=4 polygonreliefangle="90 Angle" airgapwidth=0.254
PolygonConnect Polygon_F.Cu-GND_ConnectDirect [IsNamedPolygon('F.Cu-GND')] p64: connectstyle=Direct reliefconductorwidth=0.254 reliefentries=4 polygonreliefangle="90 Angle" airgapwidth=0.254
PolygonConnect Polygon_F.Cu-BGND-1_ConnectDirect [IsNamedPolygon('F.Cu-BGND-1')] p65: connectstyle=Direct reliefconductorwidth=0.254 reliefentries=4 polygonreliefangle="90 Angle" airgapwidth=0.254
PolygonConnect Polygon_F.Cu-AGND_ConnectDirect [IsNamedPolygon('F.Cu-AGND')] p66: connectstyle=Direct reliefconductorwidth=0.254 reliefentries=4 polygonreliefangle="90 Angle" airgapwidth=0.254
PolygonConnect Polygon_F.Cu-MT_IU_ConnectDirect [IsNamedPolygon('F.Cu-MT_IU')] p67: connectstyle=Direct reliefconductorwidth=0.254 reliefentries=4 polygonreliefangle="90 Angle" airgapwidth=0.254
PolygonConnect Polygon_F.Cu-+12VA_ConnectDirect [IsNamedPolygon('F.Cu-+12VA')] p68: connectstyle=Direct reliefconductorwidth=0.254 reliefentries=4 polygonreliefangle="90 Angle" airgapwidth=0.254
PolygonConnect Polygon_F.Cu-BGND_ConnectDirect [IsNamedPolygon('F.Cu-BGND')] p69: connectstyle=Direct reliefconductorwidth=0.254 reliefentries=4 polygonreliefangle="90 Angle" airgapwidth=0.254
PolygonConnect Polygon_F.Cu-+1V2_ConnectDirect [IsNamedPolygon('F.Cu-+1V2')] p70: connectstyle=Direct reliefconductorwidth=0.254 reliefentries=4 polygonreliefangle="90 Angle" airgapwidth=0.254
RoutingVias [All] p1: holewidth=0.711 width=1.27 viastyle="Through Hole" minholewidth=0.711 minwidth=1.27 maxholewidth=0.711 maxwidth=1.27
SilkToSilkClearance [All] p1: silktosilkclearance=0
SilkToSolderMaskClearance [IsPad] p1: minsilkscreentomaskgap=0 clearancetoexposedcopper=TRUE
SolderMaskExpansion [All] p1: expansion=0.102 istentingtop=FALSE
Width [All] p1: maxlimit=10 minlimit=0.254 preferedwidth=0.254 minimp=50.000000 maximp=50.000000 favimp=50.000000
27 further rules are at their usual default settings.

## Components (designator, comment, footprint, x,y, rotation, side; value= is the part's Value field where it differs from the comment)
C1 "Comment" C_0603_1608Metric#1 15.96,22.21 r270 bottom
C2 "Comment" C_0603_1608Metric#1 -3.95,-16.08 r270 bottom
C3 "Comment" C_0402#1 4.358,21.902 r90 bottom
C4 "Comment" C_0402#1 0.898,21.91 r90 bottom
C5 "Comment" C_0402#1 5.318,21.902 r90 bottom
C6 "Comment" C_1206_3216Metric 23.055,-8.794 r0 bottom
C7 "Comment" C_0603_1608Metric#1 18.135,1.806 r180 bottom
C8 "Comment" C_0402#1 -3.428,15.91 r180 bottom
C9 "Comment" C_0402#1 -3.428,16.885 r0 bottom
C10 "Comment" C_0603_1608Metric#2 -8.14,16.87 r270 top
C11 "Comment" C_0402#1 -1.6,18.09 r90 bottom
C12 "Comment" C_0402#1 -1.39,16.24 r90 bottom
C13 "Comment" C_0402#1 -19.147,-10.514 r0 bottom
C14 "Comment" C_0603_1608Metric#1 -6.5,-16.08 r270 bottom
C15 "Comment" C_1206_3216Metric -16.39,-5.05 r0 bottom
C16 "Comment" C_1206_3216Metric -16.58,5.56 r0 bottom
C17 "Comment" C_0805_2012Metric#1 23.275,-12.892 r0 bottom
C18 "Comment" C_0402#1 -13.903,-10.402 r180 bottom
C19 "Comment" C_0805_2012Metric#1 23.345,3.124 r0 bottom
C20 "Comment" C_0402#1 2.09,19.85 r270 bottom
C21 "Comment" C_0402#1 4.32,19.89 r270 bottom
C22 "Comment" C_0402#1 3.38,19.88 r270 bottom
C23 "Comment" C_0402#1 5.27,19.89 r270 bottom
C24 "Comment" C_0805_2012Metric#2 23.345,3.946 r180 top
C25 "Comment" C_0805_2012Metric#1 18.79,-13.96 r270 bottom
C26 "Comment" C_0402#2 -7.255,-1.274 r90 top
C27 "Comment" C_0402#2 0.705,-1.332 r90 top
C28 "Comment" C_0402#2 -0.005,8.906 r270 top
C29 "Comment" C_0402#2 -3.855,-3.284 r90 top
C30 "Comment" C_0402#2 -2.125,-1.312 r90 top
C31 "Comment" C_0402#2 -3.705,8.856 r270 top
C32 "Comment" C_0402_1005Metric#1 2.555,14.034 r270 top
C33 "Comment" C_0805_2012Metric#2 23.385,-3.544 r180 top
C34 "Comment" C_0402_1005Metric#2 4.42,17.27 r90 bottom
C35 "Comment" C_0402_1005Metric#1 -0.67,13.99 r270 top
C36 "Comment" C_0402#1 1.35,17.272 r90 bottom
C37 "Comment" C_0402#2 9.388,17.63 r180 top
C38 "Comment" C_0402#2 9.89,23.04 r180 top
C39 "Comment" C_0805_2012Metric#1 20.52,-13.97 r270 bottom
C40 "Comment" C_0402#1 0.5,17.272 r90 bottom
C41 "Comment" C_0603_1608Metric#3 -4.575,26.44 r0 bottom
C42 "Comment" C_0402#1 4.63,24.35 r180 bottom
C43 "Comment" C_0603_1608Metric#3 -0.36,25.827 r270 bottom
C44 "Comment" C_0402#1 3.12,17.282 r90 bottom
C45 "Comment" C_0402#1 2.26,17.28 r90 bottom
C46 "Comment" C_0402#1 -13.435,9.256 r90 bottom
C47 "Comment" C_0402#1 -17.725,9.256 r90 bottom
C48 "Comment" C_0402#1 -10.59,15.71 r0 bottom
C49 "Comment" C_0805_2012Metric#1 23.345,1.136 r0 bottom
C50 "Comment" C_0402#1 2.46,25.45 r270 bottom
C51 "Comment" C_0402_1005Metric#1 -7.625,8.878 r90 top
C52 "Comment" C_0603_1608Metric#1 18.115,4.836 r180 bottom
C53 "Comment" C_0603_1608Metric#1 17.595,-6.064 r180 bottom
C54 "Comment" C_0603_1608Metric#1 17.425,-2.794 r180 bottom
C55 "Comment" C_0805_2012Metric#1 23.275,-11.024 r0 bottom
C56 "Comment" C_0402_1005Metric#1 -3.925,-1.324 r90 top
C57 "Comment" C_0402_1005Metric#1 -5.725,8.856 r90 top
C58 "Comment" C_0805_2012Metric#1 23.345,5.112 r0 bottom
C59 "Comment" C_0805_2012Metric#1 23.345,-6.815 r0 bottom
C60 "Comment" C_1206_3216Metric 23.285,9.296 r0 bottom
C61 "Comment" C_0805_2012Metric#1 23.345,7.1 r0 bottom
C62 "Comment" C_1206_3216Metric 23.105,-0.844 r0 bottom
C63 "Comment" C_0603_1608Metric#2 22.525,15.186 r0 top
C64 "Comment" C_0603_1608Metric#2 22.8,11.73 r0 top
C65 "Comment" C_0603_1608Metric#1 -5.23,-16.08 r270 bottom
C66 "Comment" C_0402_1005Metric#3 20.62,13.227 r90 bottom
C67 "Comment" C_0402#1 -0.79,18.09 r90 bottom
C68 "Comment" C_0402_1005Metric#1 -6.174,-15.196 r180 top
C69 "Comment" C_0805_2012Metric#2 1.39,-9.51 r0 top
C70 "Comment" C_0805_2012Metric#1 23.345,-4.827 r0 bottom
C71 "Comment" C_0402_1005Metric#1 -1.47,-17.272 r270 top
C72 "Comment" C_0402#1 -4.88,-21.71 r0 bottom
C73 "Comment" C_0402_1005Metric#1 0.99,-7.88 r180 top
C74 "Comment" CAP-SMD_BD8.0-L8.3-W8.3-LS9.1-FD 7.5,-16.96 r180 top
C75 "Comment" C_0603_1608Metric#2 1.17,-16.87 r90 top
C76 "Comment" C_0603_1608Metric#2 -0.25,-16.86 r90 top
C77 "Comment" C_0805_2012Metric#2 1.4,-11.29 r0 top
C78 "Comment" C_0402#1 -1.79,-19.305 r180 bottom
C79 "Comment" C_0603_1608Metric#1 -8.9,-16.83 r270 bottom
C80 "Comment" C_0603_1608Metric#1 -10.24,-16.79 r270 bottom
C81 "Comment" C_0402#1 -11.64,-19.838 r90 bottom
C82 "Comment" C_0603_1608Metric#2 -6.92,14.8 r180 top
C83 "Comment" C_1206_3216Metric -20.36,4.455 r270 bottom
C84 "Comment" C_0402#1 -2.87,4.338 r90 bottom
C85 "Comment" C_0402#1 0.7,19.5 r180 bottom
C86 "Comment" C_0402#1 0.058,21.91 r90 bottom
C87 "Comment" C_0402#1 3.398,21.902 r90 bottom
C88 "Comment" C_0402#1 -0.54,16.24 r90 bottom
C89 "Comment" C_0402#1 -5.225,0.426 r0 bottom
C90 "Comment" C_0402_1005Metric#1 -10.874,-19.513 r180 top
C91 "Comment" C_0402_1005Metric#1 -10.874,-17.866 r0 top
C92 "Comment" C_0402#1 -5.195,-0.504 r0 bottom
C94 "Comment" C_0402_1005Metric#3 -2.8,26.96 r270 bottom
C95 "Comment" C_0603_1608Metric#2 12.965,17.51 r180 top
C96 "Comment" C_0805_2012Metric#1 23.345,-2.839 r0 bottom
C97 "Comment" C_0805_2012Metric#1 1.38,-13.37 r180 bottom
C98 "Comment" C_0805_2012Metric#1 1.35,-11.597 r180 bottom
C99 "Comment" C_0402#1 2.34,21.932 r90 bottom
C100 "Comment" C_0402#1 -5.205,1.386 r0 bottom
C101 "Comment" C_0402_1005Metric#3 0.71,25.45 r270 bottom
C102 "Comment" C_0603_1608Metric#2 -0.393,-19.771 r270 top
C103 "Comment" C_0402#2 -19.97,14.23 r270 top
C104 "Comment" C_0402#1 17.11,22.01 r270 bottom
C106 "Comment" C_0402#1 -10.76,23.82 r0 bottom
C107 "Comment" C_0402_1005Metric#1 6.43,12.5 r180 top
C108 "Comment" C_0402_1005Metric#2 -17.04,-12.61 r270 bottom
C109 "Comment" C_0603_1608Metric#1 12.92,17.49 r0 bottom
C110 "Comment" C_1206_3216Metric -22.64,-4.18 r90 bottom
C111 "Comment" C_0603_1608Metric#2 -6.89,12.29 r180 top
C112 "Comment" C_0402#2 -5.79,17.27 r270 top
C113 "Comment" C_0603_1608Metric#2 -6.91,13.54 r180 top
C114 "Comment" C_0603_1608Metric#2 -6.92,16.87 r270 top
C115 "Comment" C_0402#1 -6.56,14.34 r0 bottom
C116 "Comment" C_0402#1 1.585,25.45 r270 bottom
C117 "Comment" C_0402_1005Metric#2 -5.21,12.73 r0 bottom
D1 "Comment" D_SMC 7.26,-19.11 r0 bottom
D6 "Comment" D_SMA -5.16,-12.5 r180 bottom
D10 "Comment" SOD-323 22.11,13.252 r90 bottom
FB1 "Comment" R_0603_1608Metric#1 -11.59,-16.79 r90 bottom
FB2 "Comment" R_0805_2012Metric#1 1.4,-13.04 r180 top
FB3 "Comment" R_0603_1608Metric#1 18.225,15.24 r0 bottom
FB4 "Comment" R_0603_1608Metric#2 1.13,-19.78 r270 top
FB5 "Comment" R_0603_1608Metric#1 -1.65,26.525 r270 bottom
FPC2 "Comment" FPC_10P_0.5mm_JTAG -9.442,24.713 r201 top
J1 "Comment" "XT30U 母头插座" 11.24,-24.754 r180 top
J5 "Comment" "XT30U 母头插座" -0.23,-24.754 r180 top
L1 "4.7uH_1.4A" L252010#1 -3.52,13.64 r0 top
L2 "Comment" IND-SMD_L7.0-W6.6_FXL0630 -4.75,-10.96 r180 top
L3 "4.7uH_1.4A" L252010#2 -9.12,-19.68 r0 bottom
LED1 "Comment" LED_0603 12.6,24.48 r0 top
LED2 "Comment" LED_0603 -23.361,-12.52 r0 top
LED3 "Comment" LED_0603 -24.605,11.176 r0 top
LED4 "Comment" LED_0603 10.12,25.72 r180 top
LED5 "Comment" LED_0603 -23.34,-13.92 r0 top
locked "网口变压器11FB-05NL" H1102_XFMR16_SM -16.575,6.286 r270 top
locked "网口变压器11FB-05NL" H1102_XFMR16_SM -16.595,-5.734 r90 top
Q1 "Comment" sot_669_2 18.965,-4.184 r0 top
Q2 "Comment" sot_669_2 8.475,-4.184 r0 top
Q3 "Comment" sot_669_2 18.965,3.056 r0 top
Q4 "Comment" sot_669_2 8.475,3.056 r0 top
Q5 "Comment" sot_669_2 18.925,10.756 r0 top
Q6 "Comment" sot_669_2 8.435,10.756 r0 top
R1 "Comment" R_0402_1005Metric#1 -8.285,-1.274 r90 top
R2 "Comment" R_0402_1005Metric#2 -7.82,19.2 r0 bottom
R3 "Comment" R_0805_2012Metric#1 -11.93,-23.7 r90 top
R4 "Comment" R_0805_2012Metric#2 -13.325,-2.044 r270 bottom
R5 "Comment" R_0805_2012Metric#2 -17.6,-2.05 r270 bottom
R6 "Comment" R_0402_1005Metric#1 -6.285,-1.304 r90 top
R7 "Comment" R_0402_1005Metric#2 -11.02,21.27 r0 bottom
R8 "Comment" R_0402_1005Metric#1 13.45,23.34 r0 top
R9 "Comment" R_0402_1005Metric#1 -5.335,-1.314 r90 top
R10 "Comment" R_1206_3216Metric -20.32,-4.167 r90 bottom
R11 "Comment" R_0402_1005Metric#1 -0.305,-1.314 r90 top
R12 "Comment" R_0402_1005Metric#1 -1.235,-1.324 r90 top
R13 "Comment" R_0402_1005Metric#1 -0.935,8.926 r270 top
R14 "Comment" R_0402_1005Metric#1 12.13,20.6 r270 top
R15 "Comment" R_0603_1608Metric#2 19.415,-3.364 r180 top
R16 "Comment" R_0402_1005Metric#1 -1.855,8.916 r270 top
R17 "Comment" R_0805_2012Metric#2 -17.59,2.556 r90 bottom
R18 "Comment" R_0805_2012Metric#2 -13.345,2.556 r90 bottom
R19 "Comment" R_0402_1005Metric#2 11.845,4.706 r90 bottom
R20 "Comment" R_0402_1005Metric#2 14.8,-2.4 r0 bottom
R21 "Comment" R_0805_2012Metric#2 -9.01,12.9 r180 bottom
R22 "Comment" R_0402_1005Metric#2 -3.24,12.73 r0 bottom
R23 "Comment" R_0402_1005Metric#2 -10.99,19.32 r0 bottom
R24 "Comment" R_0402_1005Metric#1 1.615,-1.352 r90 top
R25 "Comment" R_0402_1005Metric#2 -21.44,-13.85 r180 bottom
R26 "Comment" R_0402_1005Metric#2 -1.78,-21.27 r180 bottom
R27 "Comment" R_0402_1005Metric#1 0.965,8.886 r270 top
R28 "Comment" R_0402_1005Metric#2 -10.58,16.85 r180 bottom
R29 "Comment" R_0402_1005Metric#1 -4.805,-3.324 r90 top
R30 "Comment" R_0402_1005Metric#1 18.75,15.49 r180 top
R31 "Comment" R_0402_1005Metric#1 -3.055,-1.332 r90 top
R32 "Comment" R_0402_1005Metric#2 -12.98,21.26 r0 bottom
R33 "Comment" R_0402_1005Metric#1 -2.775,8.866 r270 top
R34 "Comment" R_0402_1005Metric#1 3.53,14.01 r90 top
R35 "Comment" R_0402_1005Metric#2 5.3,17.25 r270 bottom
R36 "Comment" R_0402_1005Metric#1 0.26,13.97 r90 top
R37 "Comment" R_0402_1005Metric#1 -4.745,8.856 r90 top
R38 "Comment" R_0402_1005Metric#1 -6.715,8.856 r270 top
R39 "Comment" R_0402_1005Metric#2 -23.64,-13.84 r180 bottom
R40 "Comment" R_0402_1005Metric#1 -24.316,12.306 r0 top
R41 "Comment" R_0402_1005Metric#2 -4.58,23.67 r180 bottom
R42 "Comment" R_0402_1005Metric#2 -1.76,-20.34 r180 bottom
R43 "Comment" R_0402_1005Metric#2 4.85,25.67 r180 bottom
R44 "Comment" R_0402_1005Metric#2 -24.74,11.76 r90 bottom
R45 "Comment" R_0603_1608Metric#2 -6.495,10.48 r180 top
R46 "Comment" R_0603_1608Metric#1 18.145,3.506 r180 bottom
R47 "Comment" R_0402_1005Metric#1 10.11,24.57 r0 top
R48 "Comment" R_0402_1005Metric#1 8.45,12.49 r180 top
R49 "Comment" RES-TH_L2.5-W2.5-P1.70-D0.3 -18.24,-14.12 r180 top
R50 "Comment" R_0603_1608Metric#1 13.85,5.39 r180 bottom
R51 "Comment" R_0402_1005Metric#2 -11.65,22.43 r180 bottom
R52 "Comment" R2010 5.625,-0.454 r90 top
R53 "Comment" R_0603_1608Metric#2 19.65,-10.54 r180 top
R54 "Comment" R_0603_1608Metric#2 10.21,-3.534 r180 top
R55 "Comment" R2010 5.695,-8.564 r90 top
R56 "Comment" R_0402_1005Metric#2 -10.99,20.29 r0 bottom
R57 "Comment" R_0402_1005Metric#2 -18,-12.59 r90 bottom
R58 "Comment" R_0402_1005Metric#2 8.725,8.866 r90 bottom
R59 "Comment" R_0402_1005Metric#2 -10.58,17.83 r0 bottom
R60 "Comment" R_0402_1005Metric#2 -21.47,-12.52 r180 bottom
R61 "Comment" R_0402_1005Metric#2 -9.82,22.43 r0 bottom
R62 "Comment" R_0402_1005Metric#2 -7.7,22.43 r0 bottom
R63 "Comment" R_0402_1005Metric#2 9.685,8.866 r90 bottom
R64 "Comment" R_0402_1005Metric#2 10.645,8.866 r90 bottom
R65 "Comment" R_0402_1005Metric#2 11.605,8.866 r90 bottom
R66 "Comment" R_0402_1005Metric#1 8.455,14.456 r0 top
R67 "Comment" R_0402_1005Metric#2 -1.77,-18.495 r180 bottom
R68 "Comment" R_0402_1005Metric#1 8.455,13.476 r0 top
R69 "Comment" R_1206_3216Metric -22.81,4.435 r270 bottom
R70 "Comment" R_0402_1005Metric#2 -1.77,-17.595 r0 bottom
R71 "Comment" R_0603_1608Metric#2 19.745,4.3 r180 top
R72 "Comment" R_0603_1608Metric#2 22.86,13.09 r0 top
R75 "Comment" R_0402_1005Metric#2 -5.36,25.3 r180 bottom
R76 "Comment" R_0603_1608Metric#2 16.645,10.806 r180 top
R78 "Comment" R2010 5.645,7.666 r90 top
R79 "Comment" R_0402_1005Metric#2 24.995,11.496 r90 bottom
R80 "Comment" R_0402_1005Metric#1 -10.874,-21.16 r180 top
R82 "Comment" C_0402_1005Metric#1 -10.93,-15.98 r0 top
R83 "Comment" C_0402_1005Metric#1 -10.93,-16.916 r0 top
R84 "Comment" R_0402_1005Metric#1 -10.874,-20.336 r0 top
R85 "Comment" C_0402_1005Metric#1 -1.83,-19.67 r90 top
R86 "Comment" C_0402_1005Metric#1 -10.874,-18.69 r0 top
R87 "Comment" R_0603_1608Metric#1 23.61,13.09 r270 bottom
R88 "Comment" R_0402_1005Metric#2 2.75,10.97 r270 bottom
R89 "Comment" R_0402_1005Metric#2 1.8,10.97 r270 bottom
R90 "Comment" R_0402_1005Metric#2 0.88,11 r270 bottom
R91 "Comment" R_0402_1005Metric#2 -0.06,11.03 r270 bottom
R92 "Comment" R_0603_1608Metric#1 17.53,-4.21 r180 bottom
R128 "Comment" R_0402_1005Metric#1 -20.96,14.21 r270 top
R129 "Comment" R_0402_1005Metric#1 -22.91,14.26 r90 top
R130 "Comment" R_0402_1005Metric#1 -21.94,14.26 r90 top
TP1 "Comment" TestPoint_Pad_D0.5mm 0.47,-7.18 r0 top
TP2 "Comment" TestPoint_Pad_D0.5mm 9.39,15.68 r0 top
TP3 "Comment" TestPoint_Pad_D0.5mm 2.44,15.14 r0 top
TP4 "Comment" SMD_3mm_Pad 17.185,-0.034 r180 top
TP5 "Comment" SMD_3mm_Pad 17.185,-7.504 r180 top
TP6 "Comment" SMD_3mm_Pad 17.185,7.436 r180 top
TP7 "Comment" TestPoint_1.5 -14.39,22.36 r180 top
TP8 "Comment" TestPoint_1.5 -14.37,20.25 r0 top
TP9 "Comment" TestPoint_Pad_D0.5mm 10.08,15.42 r0 top
TP10 "Comment" TestPoint_Pad_D0.5mm 11.68,13.27 r0 top
TP11 "Comment" TestPoint_Pad_D0.5mm 16.375,12.296 r0 top
TP12 "Comment" TestPoint_Pad_D0.5mm 8,16.42 r0 top
TP13 "Comment" TestPoint_Pad_D0.5mm 8.74,15.98 r0 top
TP14 "Comment" TestPoint_Pad_D0.5mm 2.46,6.78 r0 top
TP15 "Comment" TestPoint_Pad_D0.5mm -0.23,14.9 r0 top
TP16 "Comment" TestPoint_Pad_D0.5mm 17.295,3.466 r0 top
TP17 "Comment" TestPoint_Pad_D0.5mm 16.68,-4.124 r0 top
TP18 "Comment" TestPoint_Pad_D0.5mm 1.99,4.022 r180 top
TP19 "Comment" TestPoint_Pad_D0.5mm 1.99,4.73 r180 top
TP20 "Comment" TestPoint_Pad_D0.5mm 1.99,2.607 r180 top
TP21 "Comment" TestPoint_Pad_D0.5mm 1.99,3.314 r180 top
TP22 "Comment" TestPoint_Pad_D0.5mm -20.975,-11.374 r0 top
TP23 "Comment" TestPoint_Pad_D0.5mm -17.845,-11.402 r0 top
TP24 "Comment" TestPoint_Pad_D0.5mm -14.985,-11.454 r0 top
TP25 "Comment" TestPoint_Pad_D0.5mm -12.145,-11.434 r0 top
TP26 "Comment" TestPoint_Pad_D0.5mm -12.055,11.906 r180 top
TP27 "Comment" TestPoint_Pad_D0.5mm -14.785,11.886 r180 top
TP28 "Comment" TestPoint_Pad_D0.5mm -18.345,11.986 r180 top
TP29 "Comment" TestPoint_Pad_D0.5mm -21.105,11.976 r180 top
TP30 "Comment" TestPoint_Pad_D0.5mm -0.915,-4.234 r270 top
TP31 "Comment" TestPoint_Pad_D0.5mm -1.565,-4.614 r270 top
TP32 "Comment" TestPoint_Pad_D0.5mm -5.43,24.9 r0 top
TP33 "Comment" TestPoint_Pad_D0.5mm 7.75,26.04 r90 top
TP35 "Comment" TestPoint_Pad_D0.5mm 7.77,25.23 r90 top
TP36 "Comment" TestPoint_Pad_D0.5mm -3.33,10.15 r0 top
TP37 "Comment" TestPoint_1.5 -22.22,-16.55 r0 top
TP38 "Comment" TestPoint_1.5 -12.75,16.24 r0 top
TP39 "Comment" TestPoint_1.5 -22.45,16.85 r0 top
TP40 "Comment" TestPoint_Pad_D0.5mm 13.16,-17.47 r0 top
U1 "Comment" BGA-196_14x14_12.0x12.0mm_P0.8mm 1.09,21.66 r0 top
U2 "Comment" CONN-TH_ZH1.5-5A -26.15,-4.91 r270 top
U3 "Comment" SOIC-14_L8.7-W3.9 -3.745,3.727 r0 top
U5 "Comment" QFN-10_L3.0-W3.0-P0.50-LS3.0-BL-EP#1 14,-4.844 r90 bottom
U6 "Comment" QFN-10_L3.0-W3.0-P0.50-LS3.0-BL-EP#1 14.578,2.836 r90 bottom
U7 "Comment" CONN-TH_ZH1.5-5A -26.14,4.71 r270 top
U8 "Comment" SOT-23-6 -4.99,-19.39 r0 bottom
U9 "Comment" QFN-10_L3.0-W3.0-P0.50-LS3.0-BL-EP#2 19.218,13.096 r90 top
U10 "Comment" TSSOP-14_L5.0-W4.4-P0.65-LS6.4-BL 0.005,-0.004 r90 bottom
U13 "Comment" SOIC-8EP -6.284,-18.486 r0 top
U14 "Comment" SOT-223-4_L6.5-W3.5-P2.30-LS7.0-BR 10.73,21.72 r180 bottom
U29 "Comment" SOIC-8 -20.202,9.396 r270 bottom
X1 "Comment" 3225 9.668,20.34 r270 top

## Footprints (in the part's own frame and the unit in brackets; to place one, negate y for a bottom-side part, rotate by r counter-clockwise, add the part's x,y. Pads: shape width x height; smd on the part's side, far side on the other; paste and mask are expansions set on the pad)
3225 [mm]
  rect 1.4x1.2 smd mask+0: 1(-1.1,-0.85) 2(1.1,-0.85) 3(1.1,0.85) 4(-1.1,0.85)
  silkscreen extent -2.68,-1.68 2.03,1.68
BGA-196_14x14_12.0x12.0mm_P0.8mm [mm]
  round 0.4 smd mask+0: A1(-5.2,5.2) A2(-4.4,5.2) A3(-3.6,5.2) A4(-2.8,5.2) A5(-2,5.2) A6(-1.2,5.2) A7(-0.4,5.2) A8(0.4,5.2) A9(1.2,5.2) A10(2,5.2) A11(2.8,5.2) A12(3.6,5.2) A13(4.4,5.2) A14(5.2,5.2) B1(-5.2,4.4) B2(-4.4,4.4) B3(-3.6,4.4) B4(-2.8,4.4) B5(-2,4.4) B6(-1.2,4.4) B7(-0.4,4.4) B8(0.4,4.4) B9(1.2,4.4) B10(2,4.4) B11(2.8,4.4) B12(3.6,4.4) B13(4.4,4.4) B14(5.2,4.4) C1(-5.2,3.6) C2(-4.4,3.6) C3(-3.6,3.6) C4(-2.8,3.6) C5(-2,3.6) C6(-1.2,3.6) C7(-0.4,3.6) C8(0.4,3.6) C9(1.2,3.6) C10(2,3.6) C11(2.8,3.6) C12(3.6,3.6) C13(4.4,3.6) C14(5.2,3.6) D1(-5.2,2.8) D2(-4.4,2.8) D3(-3.6,2.8) D4(-2.8,2.8) D5(-2,2.8) D6(-1.2,2.8) D7(-0.4,2.8) D8(0.4,2.8) D9(1.2,2.8) D10(2,2.8) D11(2.8,2.8) D12(3.6,2.8) D13(4.4,2.8) D14(5.2,2.8) E1(-5.2,2) E2(-4.4,2) E3(-3.6,2) E4(-2.8,2) E5(-2,2) E6(-1.2,2) E7(-0.4,2) E8(0.4,2) E9(1.2,2) E10(2,2) E11(2.8,2) E12(3.6,2) E13(4.4,2) E14(5.2,2) F1(-5.2,1.2) F2(-4.4,1.2) F3(-3.6,1.2) F4(-2.8,1.2) F5(-2,1.2) F6(-1.2,1.2) F7(-0.4,1.2) F8(0.4,1.2) F9(1.2,1.2) F10(2,1.2) F11(2.8,1.2) F12(3.6,1.2) F13(4.4,1.2) F14(5.2,1.2) G1(-5.2,0.4) G2(-4.4,0.4) G3(-3.6,0.4) G4(-2.8,0.4) G5(-2,0.4) G6(-1.2,0.4) G7(-0.4,0.4) G8(0.4,0.4) G9(1.2,0.4) G10(2,0.4) G11(2.8,0.4) G12(3.6,0.4) G13(4.4,0.4) G14(5.2,0.4) H1(-5.2,-0.4) H2(-4.4,-0.4) H3(-3.6,-0.4) H4(-2.8,-0.4) H5(-2,-0.4) H6(-1.2,-0.4) H7(-0.4,-0.4) H8(0.4,-0.4) H9(1.2,-0.4) H10(2,-0.4) H11(2.8,-0.4) H12(3.6,-0.4) H13(4.4,-0.4) H14(5.2,-0.4) J1(-5.2,-1.2) J2(-4.4,-1.2) J3(-3.6,-1.2) J4(-2.8,-1.2) J5(-2,-1.2) J6(-1.2,-1.2) J7(-0.4,-1.2) J8(0.4,-1.2) J9(1.2,-1.2) J10(2,-1.2) J11(2.8,-1.2) J12(3.6,-1.2) J13(4.4,-1.2) J14(5.2,-1.2) K1(-5.2,-2) K2(-4.4,-2) K3(-3.6,-2) K4(-2.8,-2) K5(-2,-2) K6(-1.2,-2) K7(-0.4,-2) K8(0.4,-2) K9(1.2,-2) K10(2,-2) K11(2.8,-2) K12(3.6,-2) K13(4.4,-2) K14(5.2,-2) L1(-5.2,-2.8) L2(-4.4,-2.8) L3(-3.6,-2.8) L4(-2.8,-2.8) L5(-2,-2.8) L6(-1.2,-2.8) L7(-0.4,-2.8) L8(0.4,-2.8) L9(1.2,-2.8) L10(2,-2.8) L11(2.8,-2.8) L12(3.6,-2.8) L13(4.4,-2.8) L14(5.2,-2.8) M1(-5.2,-3.6) M2(-4.4,-3.6) M3(-3.6,-3.6) M4(-2.8,-3.6) M5(-2,-3.6) M6(-1.2,-3.6) M7(-0.4,-3.6) M8(0.4,-3.6) M9(1.2,-3.6) M10(2,-3.6) M11(2.8,-3.6) M12(3.6,-3.6) M13(4.4,-3.6) M14(5.2,-3.6) N1(-5.2,-4.4) N2(-4.4,-4.4) N3(-3.6,-4.4) N4(-2.8,-4.4) N5(-2,-4.4) N6(-1.2,-4.4) N7(-0.4,-4.4) N8(0.4,-4.4) N9(1.2,-4.4) N10(2,-4.4) N11(2.8,-4.4) N12(3.6,-4.4) N13(4.4,-4.4) N14(5.2,-4.4) P1(-5.2,-5.2) P2(-4.4,-5.2) P3(-3.6,-5.2) P4(-2.8,-5.2) P5(-2,-5.2) P6(-1.2,-5.2) P7(-0.4,-5.2) P8(0.4,-5.2) P9(1.2,-5.2) P10(2,-5.2) P11(2.8,-5.2) P12(3.6,-5.2) P13(4.4,-5.2) P14(5.2,-5.2)
  silkscreen extent -6.12,-6.12 6.12,6.12
C_0402#1 [mil]
  round 25 smd mask+0: 1(20,0) 2(-20,0)
  silkscreen extent -4,-14 4,14
C_0402#2 [mil]
  round 25 smd mask+0: 1(-20,0) 2(20,0)
  silkscreen extent -4,-14 4,14
C_0402_1005Metric#1 [mm]
  rrect25% 0.56x0.62 smd mask+0: 1(-0.48,0) 2(0.48,0)
  silkscreen extent -0.11,-0.36 0.11,0.36
C_0402_1005Metric#2 [mm]
  rrect25% 0.56x0.62 smd mask+0: 1(0.48,0) 2(-0.48,0)
  silkscreen extent -0.11,-0.36 0.11,0.36
C_0402_1005Metric#3 [mm]
  round 0.6 smd mask+0: 1(0.48,0) 2(-0.48,0)
  silkscreen extent -0.11,-0.36 0.11,0.36
C_0603_1608Metric#1 [mm]
  rrect25% 0.9x0.95 smd mask+0: 1(0.775,0) 2(-0.775,0)
  silkscreen extent -0.14,-0.51 0.14,0.51
C_0603_1608Metric#2 [mm]
  rrect25% 0.9x0.95 smd mask+0: 1(-0.775,0) 2(0.775,0)
  silkscreen extent -0.14,-0.51 0.14,0.51
C_0603_1608Metric#3 [mm]
  round 0.95 smd mask+0: 1(0.775,0) 2(-0.775,0)
  silkscreen extent -0.14,-0.51 0.14,0.51
C_0805_2012Metric#1 [mm]
  rrect25% 1x1.45 smd mask+0: 1(0.95,0) 2(-0.95,0)
  silkscreen extent -0.26,-0.73 0.26,0.73
C_0805_2012Metric#2 [mm]
  rrect25% 1x1.45 smd mask+0: 1(-0.95,0) 2(0.95,0)
  silkscreen extent -0.26,-0.73 0.26,0.73
C_1206_3216Metric [mm]
  rrect22% 1.15x1.8 smd mask+0: 1(1.475,0) 2(-1.475,0)
  silkscreen extent -0.71,-0.91 0.71,0.91
CAP-SMD_BD8.0-L8.3-W8.3-LS9.1-FD [mm]
  rect 3.61x1.26 smd mask+0: 1(-3.295,0) 2(3.295,0)
  silkscreen extent -4.23,-4.23 4.23,4.23
CONN-TH_ZH1.5-5A [mm]
  rect 1.3x1.3 hole 0.8 paste-2539.97 mask+0: 1(-3,0)
  round 1.3 hole 0.8 paste-2539.97 mask+0: 2(-1.5,0) 3(0,0) 4(1.5,0) 5(3,0)
  silkscreen extent -4.5,-1.4 4.5,2.2
D_SMA [mm]
  rrect14% 2.5x1.8 smd mask+0: 1(2,0) 2(-2,0)
  silkscreen extent -2,-1.65 3.51,1.65
D_SMC [mm]
  rrect10% 2.5x3.3 smd mask+0: 1(3.4,0) 2(-3.4,0)
  silkscreen extent -3.6,-3.25 4.91,3.25
FPC_10P_0.5mm_JTAG [mil]
  rect 11.8x25.6 smd paste+2 mask+2: 1(-88.7,55.4) 2(-69,55.3) 3(-49.3,55.3) 4(-29.6,55.3) 5(-9.9,55.3) 6(9.8,55.3) 7(29.4,55.4) 8(49.1,55.3) 9(68.8,55.3) 10(88.5,55.3)
  rect 19.7x55.1 smd paste+2 mask+2: 11(124,-55.3) 12(-124,-55.3)
  silkscreen extent -136,-90 136,43
H1102_XFMR16_SM [mil]
  rect 115x30 smd mask+0: 1(-144,175) 2(-144,125) 3(-144,75) 4(-144,25) 5(-144,-25) 6(-144,-75) 7(-144,-125) 8(-144,-175) 9(144,-175) 10(144,-125) 11(144,-75) 12(144,-25) 13(144,25) 14(144,75) 15(144,125) 16(144,175)
  silkscreen extent -147,-257 147,257
IND-SMD_L7.0-W6.6_FXL0630 [mm]
  rect 2.424x3.62 smd mask+0: 1(3.128,0) 2(-3.128,0)
  silkscreen extent -3.58,-3.38 3.58,3.38
L252010#1 [mm]
  rect 1.23x2.22 smd mask+0: 1(-1.085,0) 2(1.085,0)
  silkscreen extent -1.85,-1.27 1.85,1.27
L252010#2 [mm]
  rect 1.23x2.22 smd mask+0: 1(1.085,0) 2(-1.085,0)
  silkscreen extent -1.85,-1.27 1.85,1.27
LED_0603 [mil]
  rect 31.5x31.5 smd paste+2 mask+2: 1(33.5,0) 2(-33.5,0)
  silkscreen extent -26,-22 57,22
QFN-10_L3.0-W3.0-P0.50-LS3.0-BL-EP#1 [mm]
  rrect100% 0.25x0.7 smd mask+0: 1(1,1.575) 2(0.5,1.575) 3(0,1.575) 4(-0.5,1.575) 5(-1,1.575) 6(-1,-1.575) 7(-0.5,-1.575) 8(0,-1.575) 9(0.5,-1.575) 10(1,-1.575)
  rect 2.4x1.65 smd mask+0: 11(0,0)
  silkscreen extent -1.7,-1.7 1.7,2.48
QFN-10_L3.0-W3.0-P0.50-LS3.0-BL-EP#2 [mm]
  rrect100% 0.25x0.7 smd mask+0: 1(-1,-1.575) 2(-0.5,-1.575) 3(0,-1.575) 4(0.5,-1.575) 5(1,-1.575) 6(1,1.575) 7(0.5,1.575) 8(0,1.575) 9(-0.5,1.575) 10(-1,1.575)
  rect 2.4x1.65 smd mask+0: 11(0,0)
  silkscreen extent -1.7,-2.48 1.7,1.7
R2010 [mm]
  rect 1.283x2.7 smd mask+0: 1(-2.391,0) 2(2.391,0)
  silkscreen extent -3.26,-1.58 3.26,1.58
R_0402_1005Metric#1 [mm]
  rrect25% 0.54x0.64 smd mask+0: 1(-0.51,0) 2(0.51,0)
  silkscreen extent -0.15,-0.38 0.15,0.38
R_0402_1005Metric#2 [mm]
  rrect25% 0.54x0.64 smd mask+0: 1(0.51,0) 2(-0.51,0)
  silkscreen extent -0.15,-0.38 0.15,0.38
R_0603_1608Metric#1 [mm]
  rrect25% 0.8x0.95 smd mask+0: 1(0.825,0) 2(-0.825,0)
  silkscreen extent -0.24,-0.52 0.24,0.52
R_0603_1608Metric#2 [mm]
  rrect25% 0.8x0.95 smd mask+0: 1(-0.825,0) 2(0.825,0)
  silkscreen extent -0.24,-0.52 0.24,0.52
R_0805_2012Metric#1 [mm]
  rrect24% 1.025x1.4 smd mask+0: 1(-0.913,0) 2(0.913,0)
  silkscreen extent -0.23,-0.73 0.23,0.73
R_0805_2012Metric#2 [mm]
  rrect24% 1.025x1.4 smd mask+0: 1(0.913,0) 2(-0.913,0)
  silkscreen extent -0.23,-0.73 0.23,0.73
R_1206_3216Metric [mm]
  rrect22% 1.125x1.75 smd mask+0: 1(1.462,0) 2(-1.462,0)
  silkscreen extent -0.73,-0.91 0.73,0.91
RES-TH_L2.5-W2.5-P1.70-D0.3 [mm]
  round 1 hole 0.55 paste-2539.97 mask+0: 1(-0.85,0) 2(0.85,0)
  silkscreen extent -1.25,-1.25 1.25,1.25
SMD_3mm_Pad [mm]
  round 3 smd mask+0: 1(0,0)
SOD-323 [mm]
  rect 0.985x0.6 smd mask+0: 1(1.118,0) 2(-1.118,0)
  silkscreen extent -0.9,-0.73 1.15,0.73
SOIC-8 [mm]
  rrect100% 1.95x0.568 smd mask+0: 1(0.705,-0.905) 2(0.705,0.365) 3(0.705,1.635) 4(0.705,2.905) 5(-4.705,2.905) 6(-4.705,1.635) 7(-4.705,0.365) 8(-4.705,-0.905)
  silkscreen extent -3.91,-1.69 0.82,3.5
SOIC-8EP [mm]
  rect 1.6x0.61 smd mask+0: 1(-2.489,1.905) 2(-2.489,0.635) 3(-2.489,-0.635) 4(-2.489,-1.905) 5(2.911,-1.905) 6(2.911,-0.635) 7(2.911,0.635) 8(2.911,1.905)
  rect 2.62x3.5 smd mask+0: 9(0,0)
  silkscreen extent -2.62,-2.5 1.1,2.88
SOIC-14_L8.7-W3.9 [mm]
  rrect100% 0.574x2.038 smd mask+0: 1(-3.81,-2.769) 2(-2.54,-2.769) 3(-1.27,-2.769) 4(0,-2.769) 5(1.27,-2.769) 6(2.54,-2.769) 7(3.81,-2.769) 8(3.81,2.769) 9(2.54,2.769) 10(1.27,2.769) 11(0,2.769) 12(-1.27,2.769) 13(-2.54,2.769) 14(-3.81,2.769)
  silkscreen extent -4.7,-2.92 4.4,1.52
SOT-23-6 [mm]
  rect 1x0.55 smd mask+0: 1(-1.4,0.95) 2(-1.4,0) 3(-1.4,-0.95) 4(1.4,-0.95) 5(1.4,0) 6(1.4,0.95)
  silkscreen extent -1.52,-1.55 0.9,1.78
SOT-223-4_L6.5-W3.5-P2.30-LS7.0-BR [mm]
  rect 2.47x0.98 smd mask+0: 1(-2.835,2.3) 2(-2.835,0) 3(-2.835,-2.3)
  rect 2.47x3.6 smd mask+0: 4(2.835,0)
  silkscreen extent -1.37,-3.33 1.37,3.33
sot_669_2 [mm]
  rect 1.15x0.7 smd paste-0.05 mask+0: 1(0.645,-1.115) 2(0.645,-2.385) 3(0.645,-3.655) 4(0.645,-4.925)
  rect 3.1x4.2 smd paste-0.2 mask+0: 5(3.82,-3.02)
  rect 1.5x4.7 smd paste-0.05 mask+0: 5(6.12,-3.02)
  silkscreen extent 0.58,-5.47 5.35,-0.23
TestPoint_1.5 [mm]
  round 1.1 hole 0.8 paste-2539.97 mask+0: 1(0,0)
TestPoint_Pad_D0.5mm [mm]
  round 0.5 smd paste-0.5 mask+0: 1(0,0)
TSSOP-14_L5.0-W4.4-P0.65-LS6.4-BL [mm]
  rect 0.4x1.7 smd mask+0: 1(1.95,2.8) 2(1.3,2.8) 3(0.65,2.8) 4(0,2.8) 5(-0.65,2.8) 6(-1.3,2.8) 7(-1.95,2.8) 8(-1.95,-2.8) 9(-1.3,-2.8) 10(-0.65,-2.8) 11(0,-2.8) 12(0.65,-2.8) 13(1.3,-2.8) 14(1.95,-2.8)
  silkscreen extent -2.5,-1.74 2.51,1.74
"XT30U 母头插座" [mm]
  round 3 hole 2 paste-2539.97 mask+0: 1(2.5,0) 2(7.5,0)
  silkscreen extent -0.3,-2.5 10,2.5